# Altium PCB Motherboard.PcbDoc (part 1 of 5)
Units mm, origin at the board's own origin, x right, y up, seen from the top; angles counter-clockwise.
Board outline 133.86 x 67.84 mm, 4 copper layers (Top Layer, Power Plane, Ground Plane, Bottom Layer), stack 1.586 mm thick; 260 components, 155 nets, 877 pads, 1037 vias.
Unrouted connection lines stored in the file: 43.
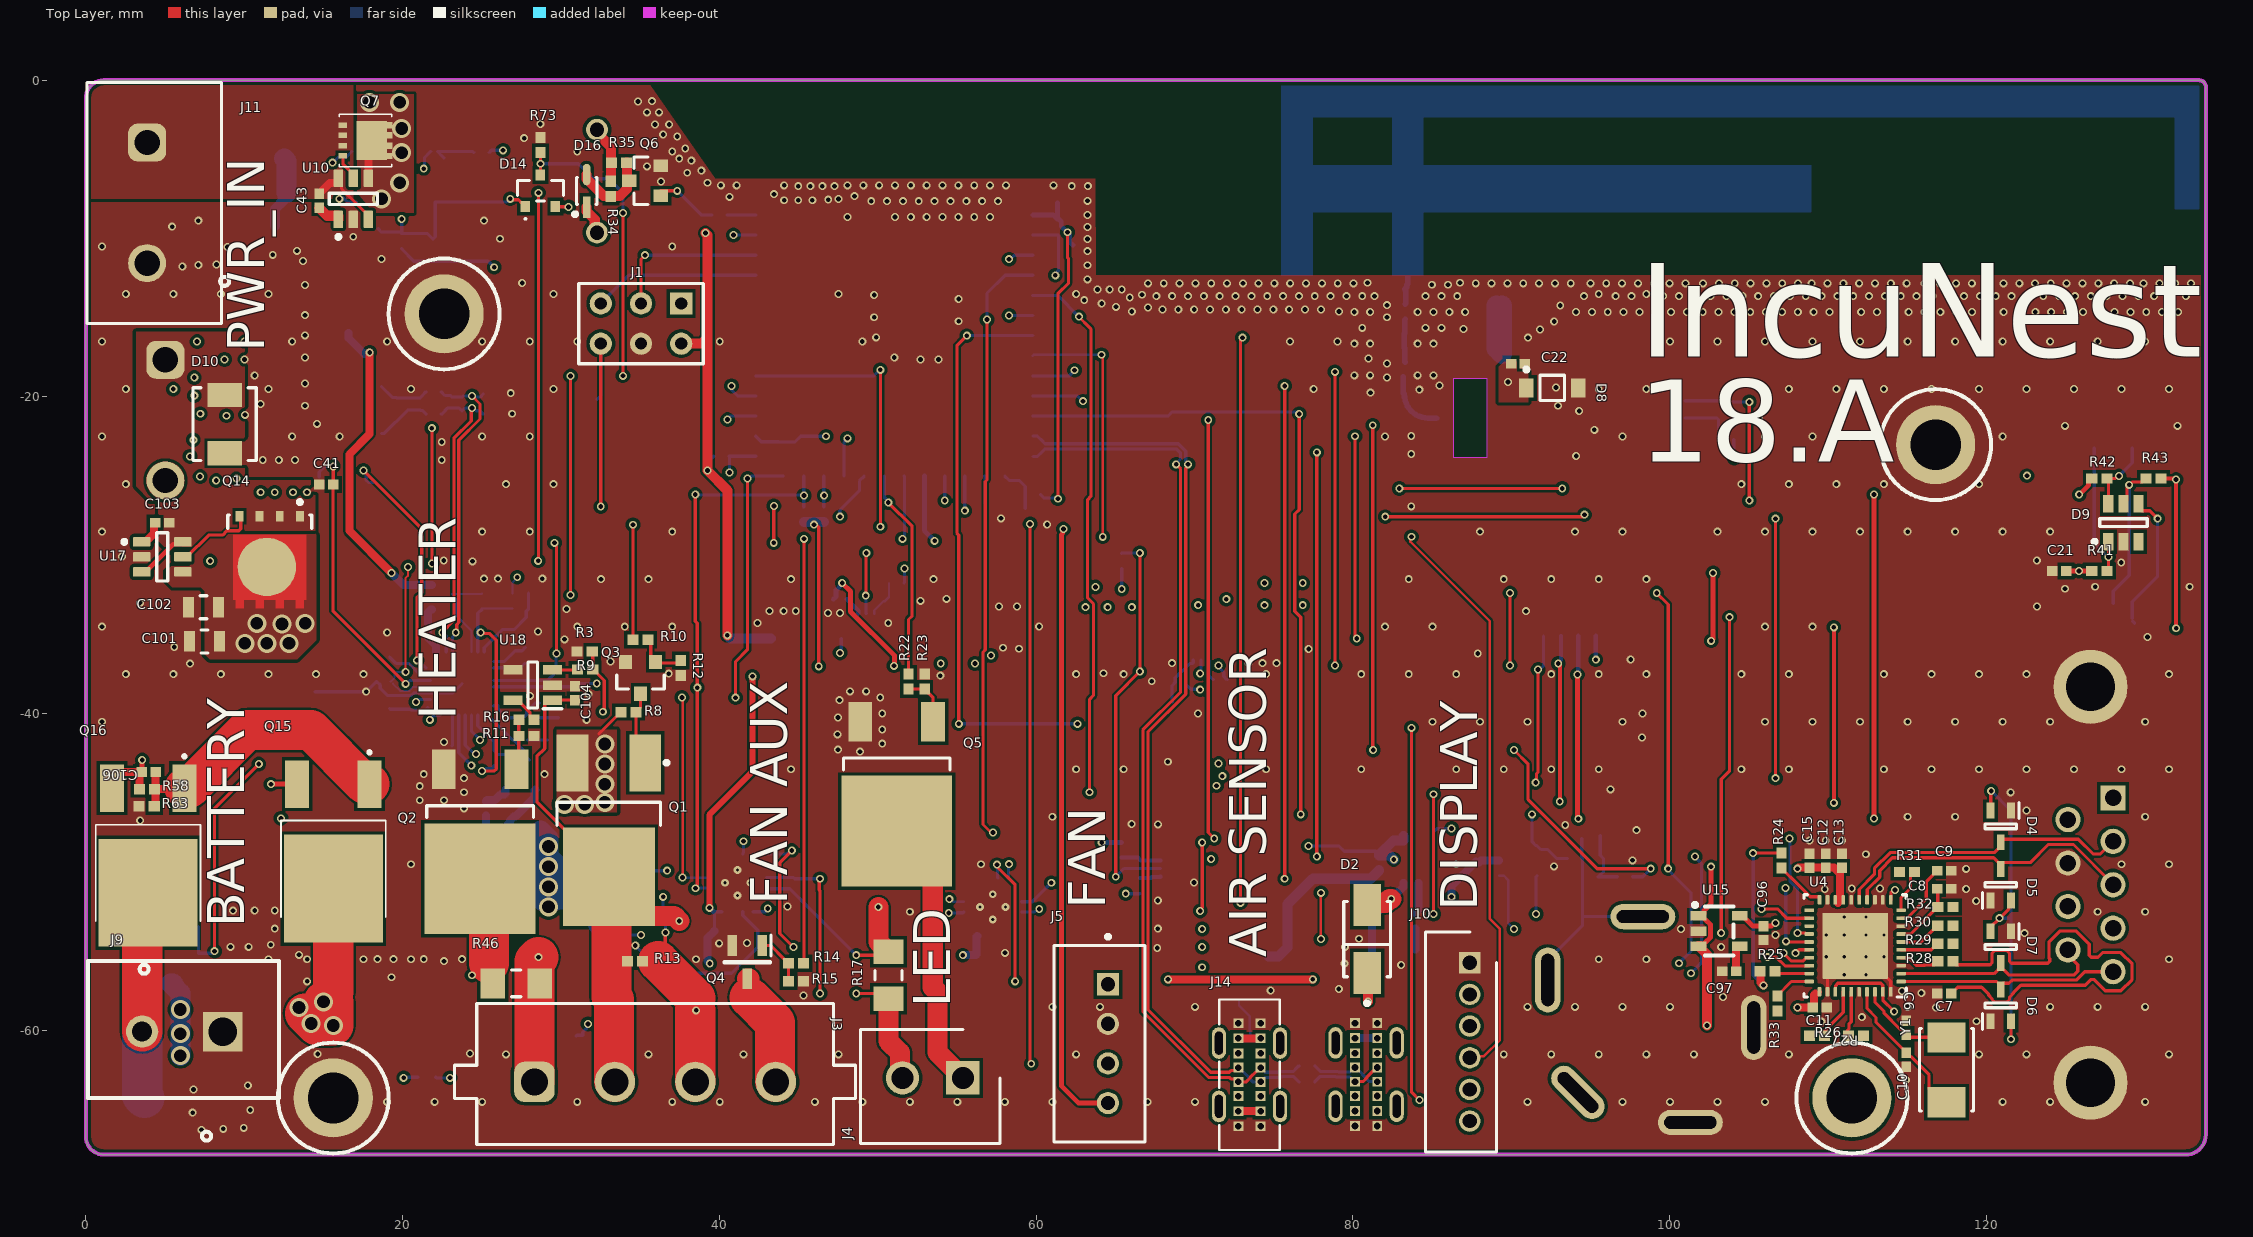
[diagram p0: Top Layer view]
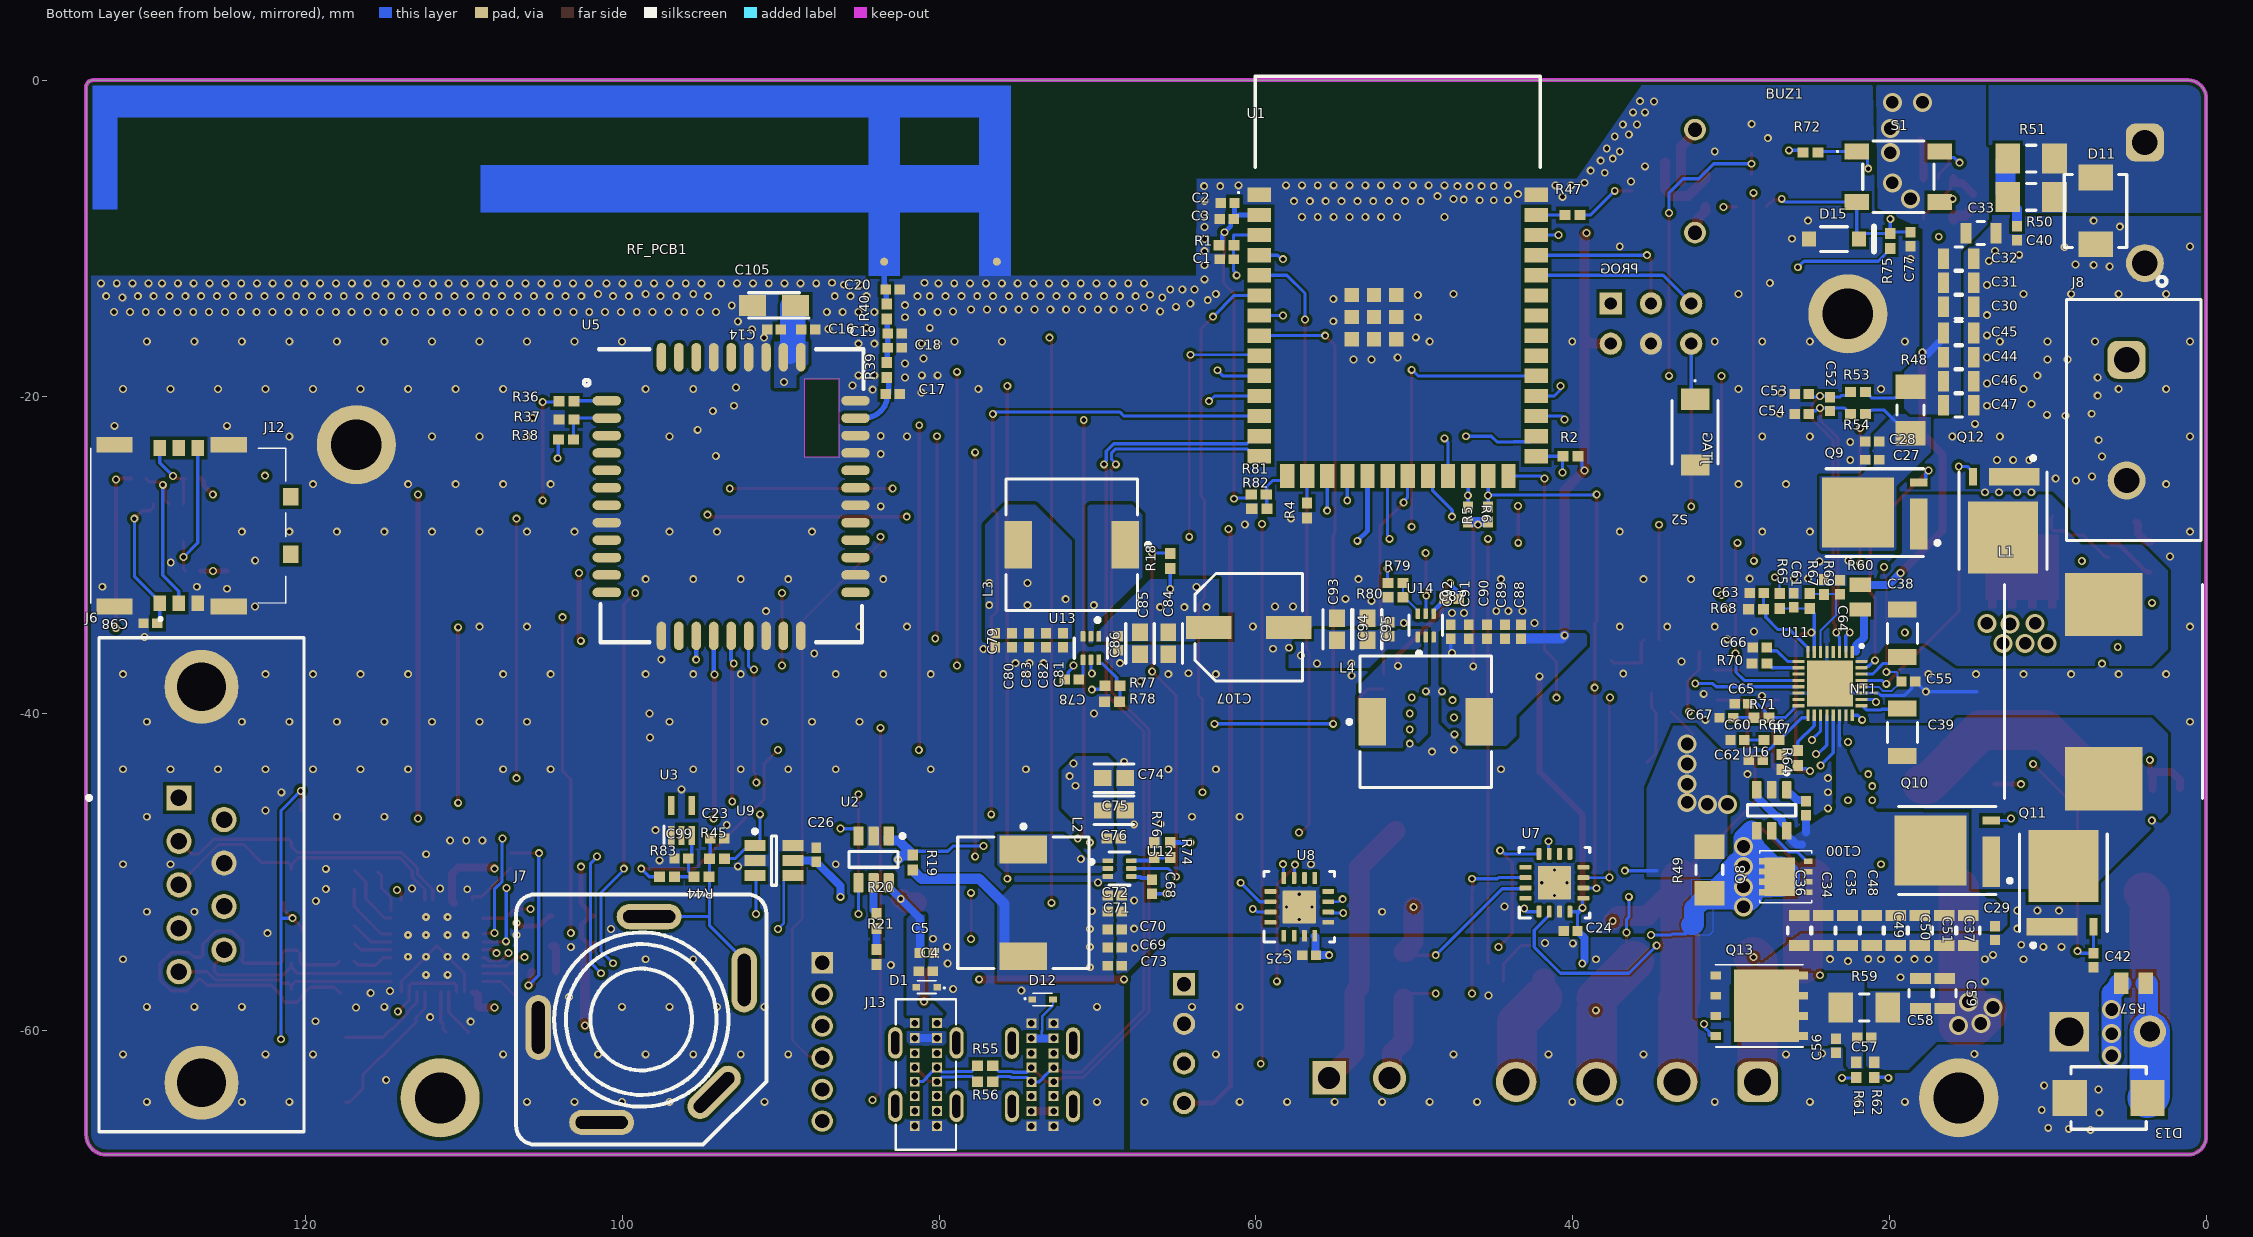
[diagram p1: Bottom Layer view, seen from below]
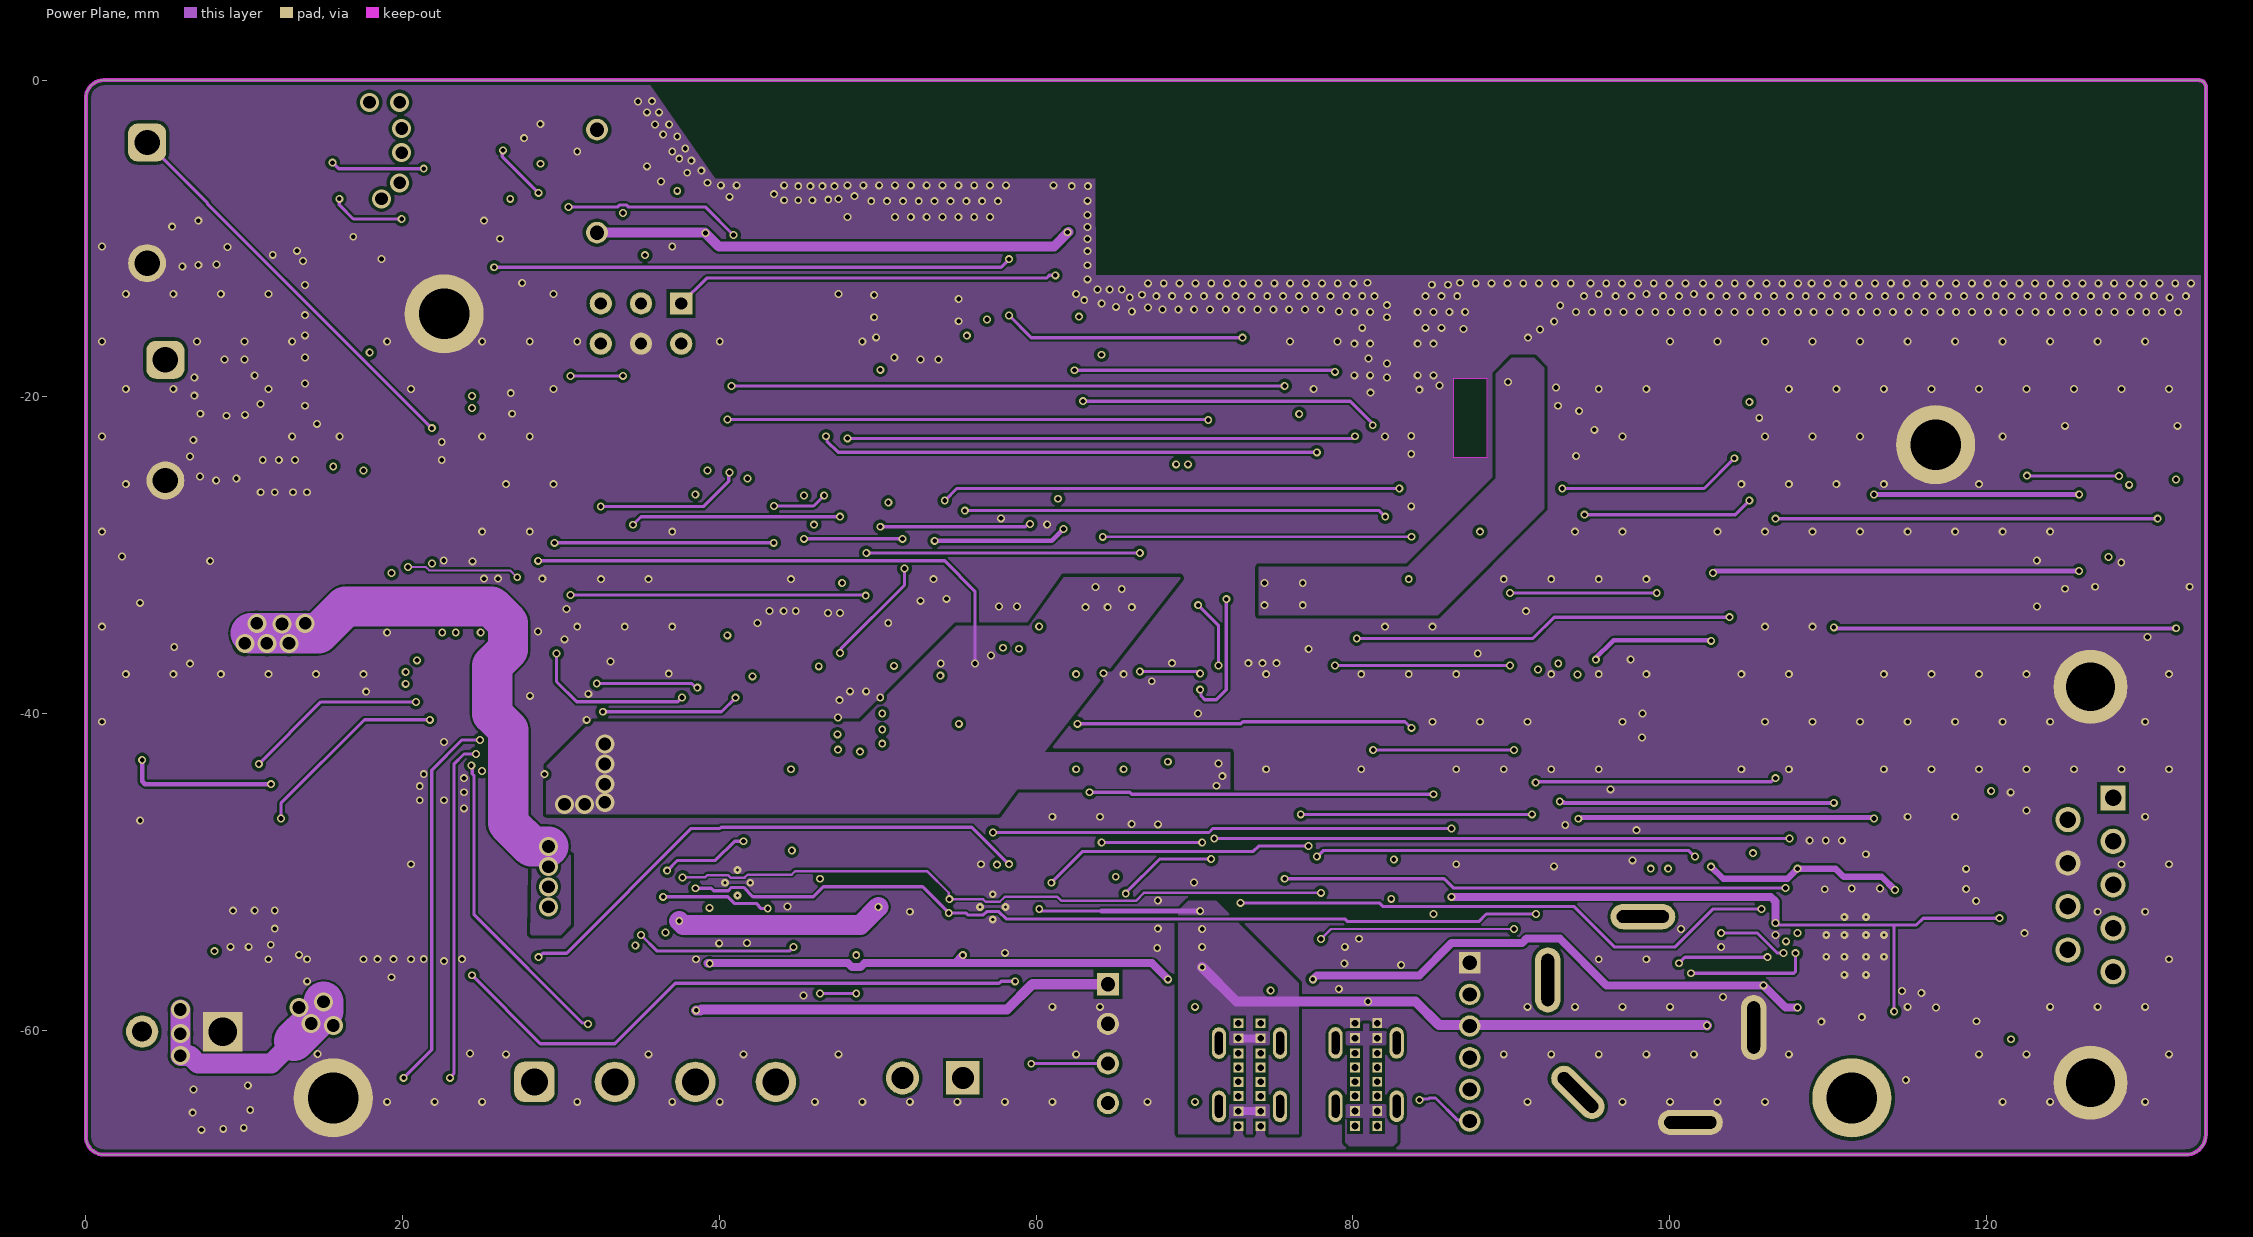
[diagram p2: Power Plane]
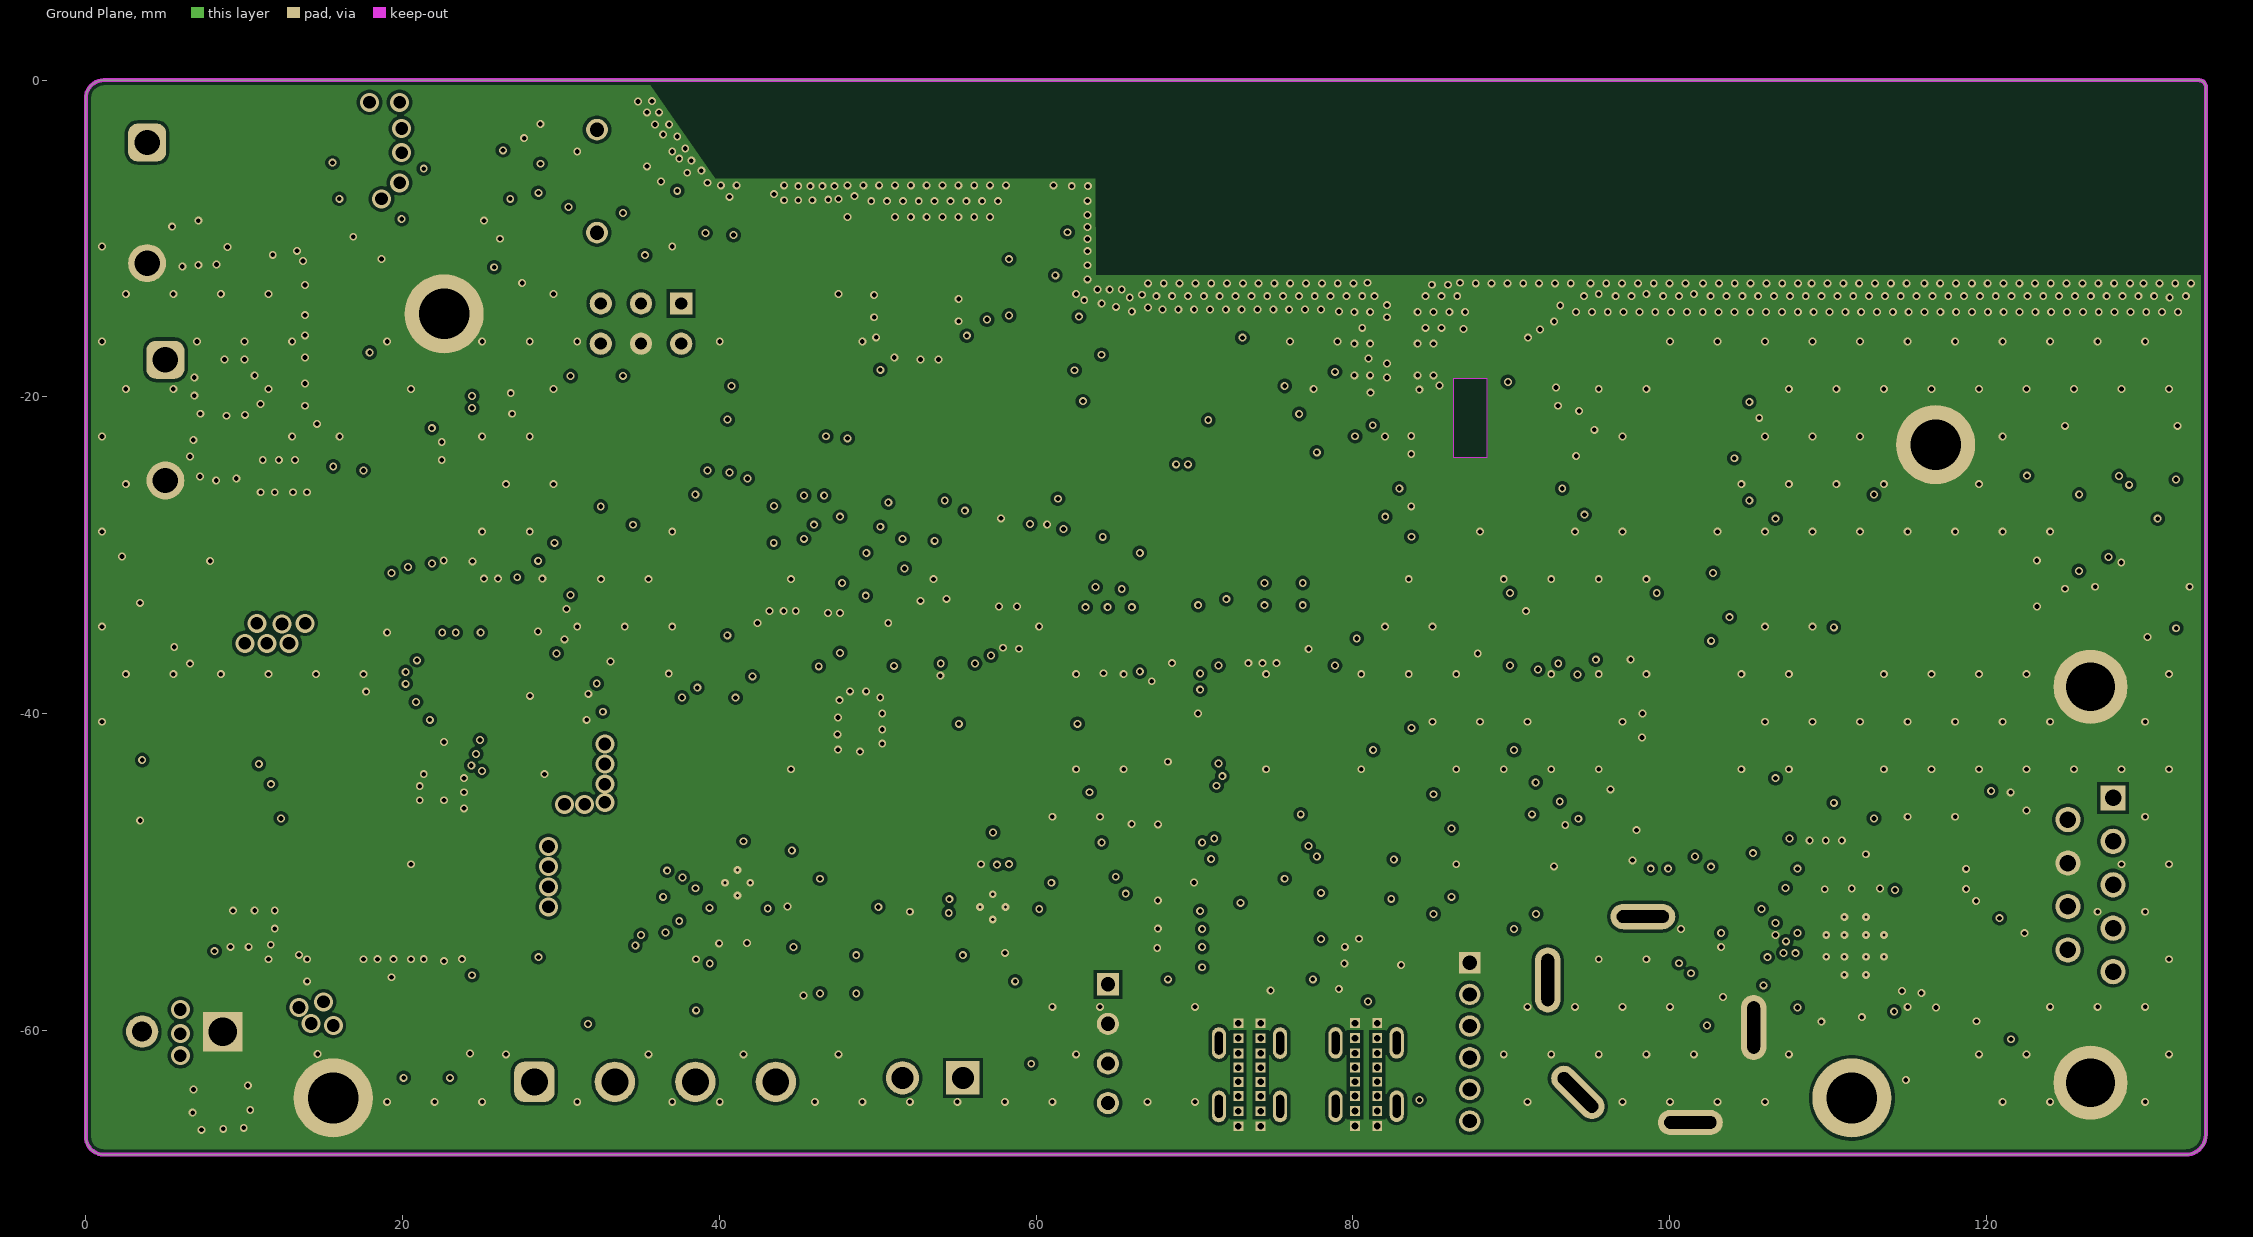
[diagram p3: Ground Plane]
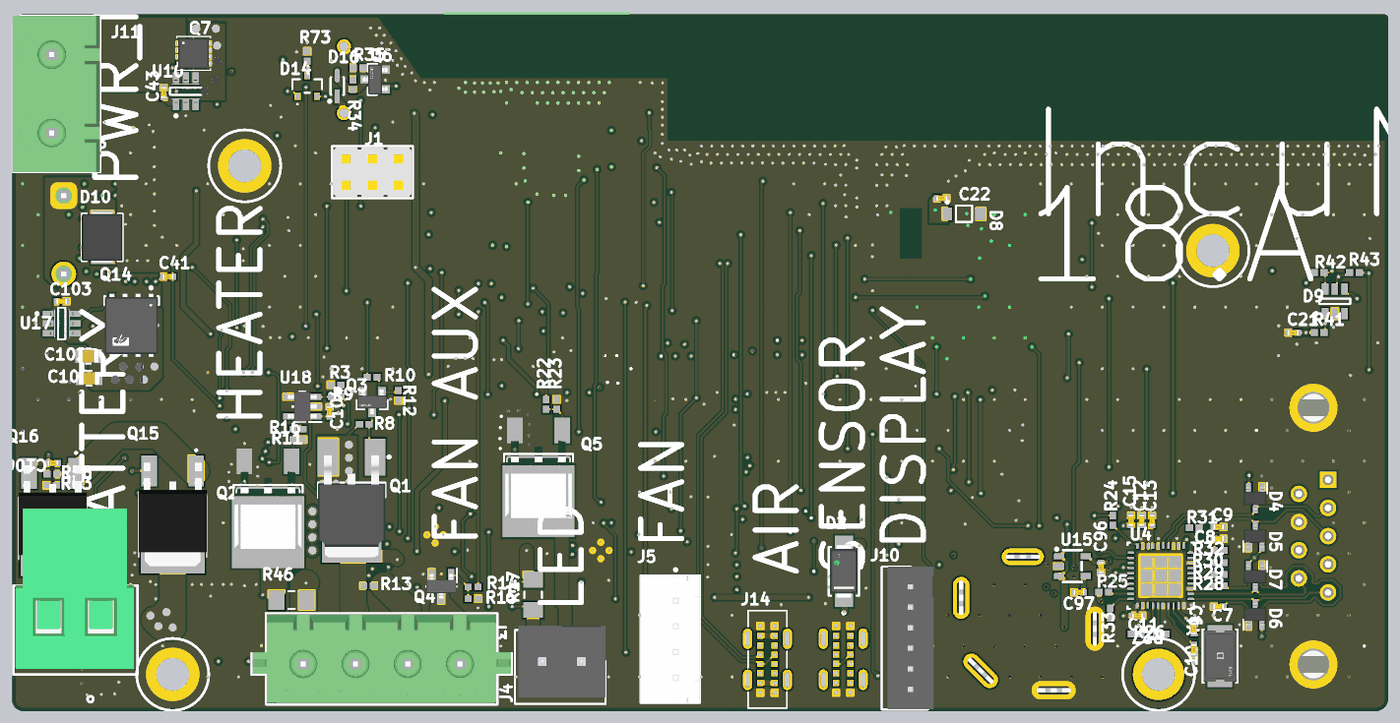
[diagram p6: 3D render of the assembled board from above, using the file's embedded part models]
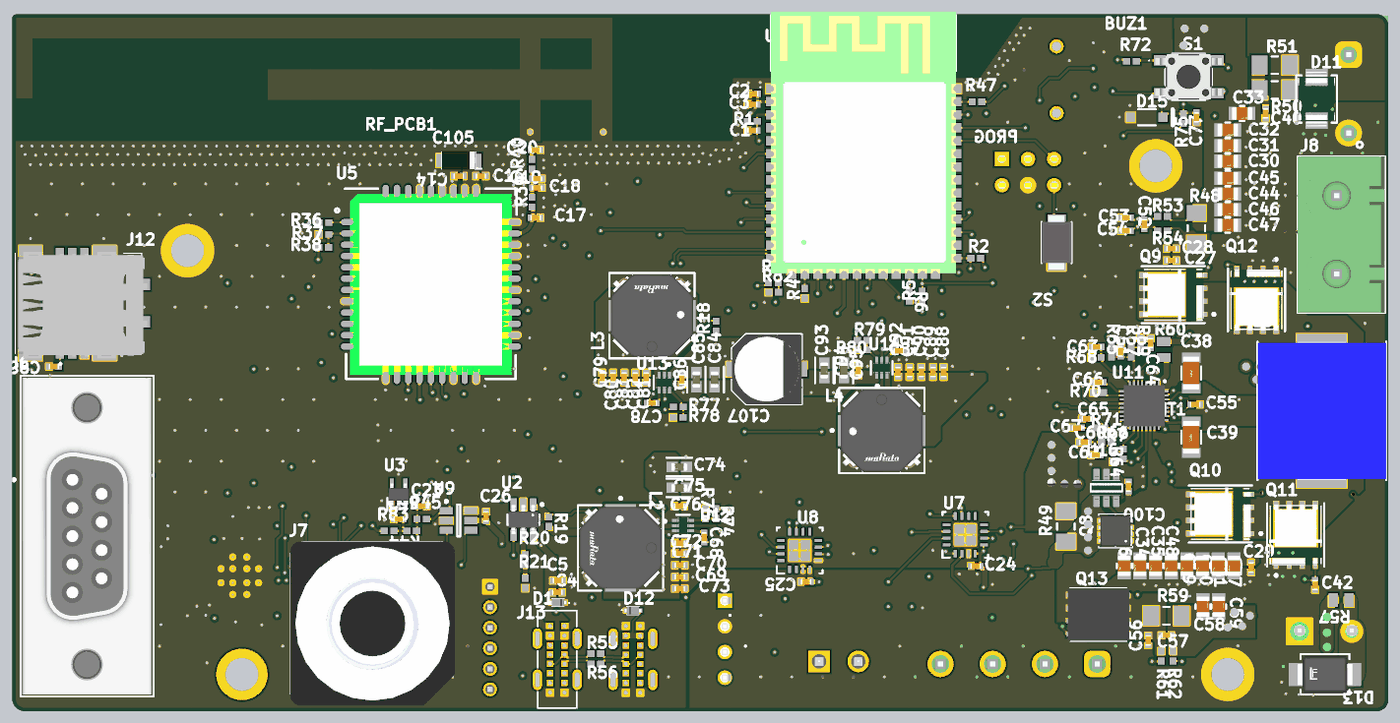
[diagram p7: 3D render of the assembled board from below, using the file's embedded part models]

## Layer stack, top to bottom
Top Solder: solder mask 0.0254, Solder Resist, Dk 3.5
Top Layer: signal copper 0.035
Core1: prepreg 0.2104, FR-4, Dk 3.95
Power Plane: signal copper 0.0152
Core2: core 1.065, FR-4, Dk 3.95
Ground Plane: signal copper 0.0152
Core3: prepreg 0.2104, FR-4, Dk 3.95
Bottom Layer: signal copper 0.035
Bottom Solder: solder mask 0.0254, Solder Resist, Dk 3.5

## Board outline
0,-66.699 0,-1.143 cw(c1.143,-1.143) 1.143,0 133.424,0 cw(c133.424,-0.434) 133.858,-0.434 133.858,-66.572 cw(c132.588,-66.572) 132.588,-67.842 1.143,-67.842 cw(c1.143,-66.699)

## Design rules (kind name [scope] priority, off if disabled: settings)
AssemblyTestPointUsage AssemblyTestPointUsage_1 [All] p2:
AssemblyTestpoint AssemblyTestpoint_1 [All] p2: testpointundercomponent=TRUE minsize=1.016 maxsize=2.54 preferedsize=1.524 minholesize=0 maxholesize=1.016 preferedholesize=0.813 testpointgrid=0.025 usegrid=TRUE gridtolerance=0 allowsidetop=TRUE allowsidebottom=TRUE
Clearance "Board outline clearance" [All vs OnLayer('Keep-Out Layer')] p1: gap=0.2 ignorepadtopadclearanceinfootprint=FALSE except(0: Arc-Hole Track-Hole SMDPad-Hole THPad-Hole Via-Hole Fill-Hole Poly-Hole Region-Hole Text-Hole)
Clearance Clearance_1 [All] p2: gap=0.2 ignorepadtopadclearanceinfootprint=FALSE except(0: Arc-Text Track-Text SMDPad-Text THPad-Text Via-Text Fill-Text Poly-Text Region-Text Text-Text Text-Hole; 0.102: Arc-Arc Arc-Track Arc-SMDPad Track-Track Track-SMDPad; 0.127: Arc-THPad Arc-Via Arc-Fill Arc-Poly Arc-Region Arc-Hole Track-THPad Track-Via Track-Fill Track-Poly Track-Region Track-Hole; 0.152: SMDPad-SMDPad; 0.203: SMDPad-THPad THPad-THPad; 0.254: Via-Via)
ComponentClearance [InComponent('L1')] p1: gap=0 collisioncheckmode=3 verticalgap=0.254 showdistances=FALSE
ComponentClearance UFL [InComponent('RF_CON1')] p2: gap=0 collisioncheckmode=3 verticalgap=0.254 showdistances=FALSE
ComponentClearance ComponentClearance_1 [All] p3: gap=0.254 collisioncheckmode=3 verticalgap=0.254 showdistances=FALSE
DiffPairsRouting DiffPair_USBDiffPairsRouting [InDifferentialPairClass('USB')] p1: maxlimit=0.127 minlimit=0.127 mostfreqgap=0.127 toplayer_minwidth=0.127 toplayer_maxwidth=0.194 toplayer_prefwidth=0.194 midlayer1_minwidth=0.127 midlayer1_maxwidth=0.159 midlayer1_prefwidth=0.159 midlayer2_minwidth=0.127 midlayer2_maxwidth=0.159 midlayer2_prefwidth=0.159 bottomlayer_minwidth=0.127 bottomlayer_maxwidth=0.194 bottomlayer_prefwidth=0.194 impedanceprofiledriven=TRUE impedanceprofileid={170D84A8-33D3-444B-B09E-1C0FCCCC4F91} impedanceprofilevalue=90.000000 maxuncoupledlength=12.7
FabricationTestPointUsage FabricationTestPointUsage_1 [All] p2: valid=0 allowmultiple=FALSE
FabricationTestpoint FabricationTestpoint_1 [All] p2: side=3 testpointundercomponent=TRUE minsize=1.016 maxsize=2.54 preferedsize=1.524 minholesize=0 maxholesize=1.016 preferedholesize=0.813 testpointgrid=0.025 allowsidetop=TRUE allowsidebottom=TRUE usegrid=TRUE gridtolerance=0
FanoutControl Fanout_LCC [IsLCC] p1: bgadir=Out bgaviamode=Centered fanoutstyle=Auto fanoutdirection=Alternating viagrid=0.025 // Fanout_LCC (Default Rule)
FanoutControl Fanout_BGA [IsBGA] p2: bgadir=Out bgaviamode=Centered fanoutstyle=Auto fanoutdirection=Alternating viagrid=0.025 // Fanout_BGA (Default Rule)
FanoutControl Fanout_Small [(CompPinCount < 5)] p3: bgadir=Out bgaviamode=Centered fanoutstyle=Auto fanoutdirection=OutThenIn viagrid=0.025 // Fanout_Small (Default Rule)
FanoutControl Fanout_SOIC [IsSOIC] p4: bgadir=Out bgaviamode=Centered fanoutstyle=Auto fanoutdirection=Alternating viagrid=0.025 // Fanout_SOIC (Default Rule)
FanoutControl Fanout_BGA_1 [IsBGA] p6: bgadir=Out bgaviamode=Centered fanoutstyle=Auto fanoutdirection=Alternating viagrid=0.025 // Fanout_BGA (Default Rule)
FanoutControl Fanout_LCC_1 [IsLCC] p7: bgadir=Out bgaviamode=Centered fanoutstyle=Auto fanoutdirection=Alternating viagrid=0.025 // Fanout_LCC (Default Rule)
FanoutControl Fanout_SOIC_1 [IsSOIC] p8: bgadir=Out bgaviamode=Centered fanoutstyle=Auto fanoutdirection=Alternating viagrid=0.025 // Fanout_SOIC (Default Rule)
FanoutControl Fanout_Small_1 [(CompPinCount < 5)] p9: bgadir=Out bgaviamode=Centered fanoutstyle=Auto fanoutdirection=OutThenIn viagrid=0.025 // Fanout_Small (Default Rule)
FanoutControl Fanout_Default_1 [All] p10: bgadir=Out bgaviamode=Centered fanoutstyle=Auto fanoutdirection=Alternating viagrid=0.025 // Fanout_Default (Default Rule)
Height Height_1 [All] p1: minheight=0 maxheight=50 prefheight=12.7
HoleSize HoleSize_1 [All] p1: absolutevalues=TRUE maxlimit=15 minlimit=0.2 maxpercent=80.000 minpercent=20.000
HoleToHoleClearance u8 [All vs InComponent('u8_1')] p1: gap=0 allowstackedmicrovias=TRUE
HoleToHoleClearance [All] p2: gap=0.254 allowstackedmicrovias=TRUE
LayerPairs LayerPairs_1 [All] p1: enforce=TRUE
MatchedLengths DiffPair_USBMatchedLengths [InDifferentialPairClass('USB')] p1: tolerance=25.4 checknetsindiffpair=FALSE checkdiffpairvsdiffpair=TRUE checkxsignals=TRUE checkothers=TRUE
MinimumAnnularRing [All] p1: minimumring=0.09
MinimumSolderMaskSliver MinimumSolderMaskSliver_1 [All] p1 off: minsoldermaskwidth=0.2
NetAntennae NetAntennae_1 [All] p2: netantennaetolerance=0
PasteMaskExpansion PasteMaskExpansion_1 [All] p2: expansion=0
PlaneClearance PlaneClearance_1 [All] p1: clearance=0.508
PlaneConnect PlaneConnect_1 [All] p1: planeconnectstyle=Direct reliefexpansion=0.508 reliefentries=4 reliefconductorwidth=0.7 reliefairgap=0.254
PolygonConnect Power [All] p1: connectstyle=Direct reliefconductorwidth=2.54 reliefentries=4 polygonreliefangle="90 Angle" airgapwidth=0.254
PolygonConnect Via [IsVia] p2: connectstyle=Direct reliefconductorwidth=0.254 reliefentries=4 polygonreliefangle="90 Angle" airgapwidth=0.254
PolygonConnect [All] p3: connectstyle=Direct reliefconductorwidth=0.508 reliefentries=4 polygonreliefangle="90 Angle" airgapwidth=0.254
RoutingCorners RoutingCorners_1 [All] p2: cornerstyle=45-Degree minsetback=2.54 maxsetback=2.54
RoutingLayers RoutingLayers_1 [All] p2: top layer_v5=TRUE mid layer 1_v5=TRUE mid layer 2_v5=TRUE bottom layer_v5=TRUE
RoutingPriority RoutingPriority_1 [All] p2: routingpriority=0
RoutingTopology RoutingTopology_1 [All] p2: topology=Shortest
RoutingVias RoutingVias_1 [All] p1: holewidth=0.3 width=0.5 viastyle="Through Hole" minholewidth=0.2 minwidth=0.4 maxholewidth=0.711 maxwidth=1.27
ShortCircuit ShortCircuit_Grounds [InNet('PGND') vs InNet('DGND')] p1: allowed=TRUE
ShortCircuit ShortCircuit_Antenna [InNet('NetC20_2')] p2: allowed=TRUE
ShortCircuit [All] p3: allowed=FALSE
SilkToBoardRegionClearance SilkToBoardRegionClearance_1 [InNet('No Net')] p2 off:
SilkToSilkClearance SilkToSilkClearance_1 [All] p1: silktosilkclearance=0
SilkToSolderMaskClearance SilkToSolderMaskClearance_1 [IsPad] p1: minsilkscreentomaskgap=0 clearancetoexposedcopper=TRUE
SolderMaskExpansion [All] p1: expansion=0.102 istentingtop=FALSE
SolderMaskExpansion SolderMaskExpansion_1 [All] p2: expansion=0.102 istentingtop=FALSE
SupplyNets "Schematic Supply Nets" [InNet('V_IN_PROTECTED')] p1: voltage=0.000
SupplyNets "Schematic Supply Nets_1" [InNet('V_OUT')] p2: voltage=0.000
SupplyNets "Schematic Supply Nets_13" [InNet('4V@2A')] p3: voltage=0.000
SupplyNets "Schematic Supply Nets_12" [InNet('DC_ACTUATORS')] p4: voltage=0.000
SupplyNets "Schematic Supply Nets_11" [InNet('V_SYS')] p5: voltage=0.000
SupplyNets "Schematic Supply Nets_10" [InNet('DGND')] p6: voltage=0.000
SupplyNets "Schematic Supply Nets_9" [InNet('3v3_dig@2A')] p7: voltage=0.000
SupplyNets "Schematic Supply Nets_7" [InNet('VUSB')] p8: voltage=0.000
SupplyNets "Schematic Supply Nets_6" [InNet('3v3_ANA@250mA')] p9: voltage=0.000
SupplyNets "Schematic Supply Nets_4" [InNet('V_DDA')] p10: voltage=0.000
SupplyNets "Schematic Supply Nets_3" [InNet('5V@2A')] p11: voltage=0.000
UnRoutedNet UnRoutedNet_1 [All] p1:
UnpouredPolygon UnpouredPolygon_1 [All] p2:
Width Width_GSM_ANTENNA_1 [InNet('NetC17_2') or InNet('NetC18_2') or InNet('NetC20_2')] p1: maxlimit=0.35 minlimit=0.35 preferedwidth=0.35
Width Width_1 [All] p2: maxlimit=8 minlimit=0.1 preferedwidth=0.2
13 further rules are at their usual default settings.

## Classes and differential pairs
differential pair class USB_AUX: USB
component class U_Display: J10
differential pair class USB: D
component class U_Power_Input: C27 C28 C29 C30 C31 C32 C33 C34 C35 C36 C37 C38 C39 C40 C41 C42 C43 C44 C45 C46 C47 C48 C49 C50 C51 C52 C53 C54 C55 C56 C57 C58 C59 C60 C61 C62 C63 C64 C65 C66 C67 C100 C101 C102 C103 C106 D10 D11 D13 J8 J9 J11 L1 NT1 Q7 Q8 Q9 Q10 Q11 Q12 Q13 Q14 Q15 Q16 R7 R48 R49 R50 R51 R53 R54 R57 R58 R59 R60 R61 R62 R63 R64 R65 R66 R67 R68 R69 R70 R71 U10 U11 U16 U17
component class U_GSM: C14 C16 C17 C18 C19 C20 C21 C22 C98 C105 D8 D9 D22 D23 D24 J12 R36 R37 R38 R39 R40 R41 R42 R43 RF_PCB1 U5
differential pair class AFE: IN TX
net class GPRS_RF: NetC17_2 NetC18_2 NetC20_2
component class U_Buzzer: BUZ1 D16 Q6 R34 R35 R47
component class U_AFE: C6 C7 C8 C9 C10 C11 C12 C13 C15 D4 D5 D6 D7 D22 J6 R24 R25 R26 R27 R28 R29 R30 R31 R32 R33 U4 Y1
component class U_Actuators: C4 C5 C104 D1 D2 D20 D21 J3 J4 J5 J13 Q1 Q2 Q3 Q4 Q5 R8 R9 R10 R11 R12 R13 R14 R15 R16 R17 R19 R20 R21 R22 R23 R46 R55 R56 SW1 U2 U18
component class U_sensors: 1 2 3 4 AGND1 C23 C24 C25 C26 C99 D12 DGND1 J7 J14 R44 R45 R83 U3 U7 U8 U9
component class U_power: C68 C69 C70 C71 C72 C73 C74 C75 C76 C77 C78 C79 C80 C81 C82 C83 C84 C85 C86 C87 C88 C89 C90 C91 C92 C93 C94 C95 C96 C97 C107 D14 D15 L2 L3 L4 R18 R72 R73 R74 R75 R76 R77 R78 R79 R80 S1 U12 U13 U14 U15
component class U_uC: C1 C2 C3 J1 R1 R2 R3 R4 R5 R6 R81 R82 S2 U1
differential pair USB: +USB_P -USB_N
differential pair D: +D_P -D_N
differential pair TX: +TX_P -TX_N
differential pair IN: +IN_P -IN_N

## Components (designator, comment, footprint, x,y, rotation, side; value= is the part's Value field where it differs from the comment)
BUZ1 "CUI CMT-1285C-035" BUZZER-12MM-NS 32.273,-6.374 r270 bottom
C1 "1uF 0402 X5R 50V" CAPC1005X55X25NL5T10 61.849,-11.303 r180 bottom
C2 "10uF 0402 X5R 10V" CAPC1005X55X25NL5T10 61.79,-7.747 r180 bottom
C3 "100nF 0402 X7R 50V" CAPC1005X55X25NL5T10 61.849,-8.763 r180 bottom
C4 "10uF 0402 X5R 10V" CAPC1005X55X25NL5T10 80.831,-56.261 r0 bottom
C5 "10uF 0402 X5R 10V" CAPC1005X55X25NL5T10 80.772,-55.118 r0 bottom
C6 "18pF 0402 X5R 50V" CAPC1005X55X25NL5T10 114.935,-59.817 r270 top
C7 "10nF 0402 X7R 50V" CAPC1005X55X25NL5T10 117.348,-57.658 r0 top
C8 "2.2uF 0402 X5R 25V" CAPC1005X55X25NL5T10 117.348,-51.057 r180 top
C9 "2.2uF 0402 X5R 25V" CAPC1005X55X25NL5T10 117.348,-49.914 r180 top
C10 "18pF 0402 X5R 50V" CAPC1005X55X25NL5T10 114.935,-61.849 r90 top
C11 "100nF 0402 X7R 50V" CAPC1005X55X25NL5T10 109.474,-58.547 r180 top
C12 "100nF 0402 X7R 50V" CAPC1005X55X25NL5T10 109.855,-49.276 r270 top
C13 "1uF 0402 X5R 50V" CAPC1005X55X25NL5T10 110.871,-49.276 r270 top
C14 "10uF 0402 X5R 10V" CAPC1005X55X25NL5T10 90.424,-15.748 r180 bottom
C15 "10uF 0402 X5R 10V" CAPC1005X55X25NL5T10 108.839,-49.276 r270 top
C16 "15pF 0402 X5R 50V" CAPC1005X55X25NL5T10 88.265,-15.748 r0 bottom
C17 "100nF 0402 X7R 50V" CAPC1005X55X25NL5T10 82.931,-19.812 r0 bottom
C18 "100nF 0402 X7R 50V" CAPC1005X55X25NL5T10 82.804,-16.891 r0 bottom
C19 "100nF 0402 X7R 50V" CAPC1005X55X25NL5T10 82.804,-16.002 r0 bottom
C20 "100nF 0402 X7R 50V" CAPC1005X55X25NL5T10 82.931,-13.208 r0 bottom
C21 "18pF 0402 X5R 50V" CAPC1005X55X25NL5T10 124.587,-30.988 r0 top
C22 "33pF 0402 X7R 50V" CAPC1005X55X25NL5T10 90.424,-17.907 r0 top
C23 "100nF 0402 X7R 50V" CAPC1005X55X25NL5T10 94.014,-47.879 r0 bottom
C24 "100nF 0402 X7R 50V" CAPC1005X55X25NL5T10 40.132,-53.721 r180 bottom
C25 "100nF 0402 X7R 50V" CAPC1005X55X25NL5T10 56.642,-55.245 r180 bottom
C26 "100nF 0402 X7R 50V" CAPC1005X55X25NL5T10 87.757,-48.895 r270 bottom
C27 "10nF 0402 X7R 50V" CAPC1005X55X25NL5T10 21.087,-23.962 r180 bottom
C28 "1nF 0402 X7R 50V" CAPC1005X55X25NL5T10 21.09,-22.818 r180 bottom
C29 "10nF 0402 X7R 50V" CAPC1005X55X25NL5T10 13.335,-53.848 r90 bottom
C30 "10uF 0805 X5R 50V" FP-GRM21B-0_2-e0_2_0_7-MFG 15.621,-14.314 r180 bottom
C31 "10uF 0805 X5R 50V" FP-GRM21B-0_2-e0_2_0_7-MFG 15.621,-12.79 r180 bottom
C32 "10uF 0805 X5R 50V" FP-GRM21B-0_2-e0_2_0_7-MFG 15.621,-11.266 r180 bottom
C33 "10uF 0805 X5R 50V" FP-GRM21B-0_2-e0_2_0_7-MFG 14.224,-9.652 r180 bottom
C34 "10uF 0805 X5R 50V" FP-GRM21B-0_2-e0_2_0_7-MFG 24.167,-53.692 r270 bottom
C35 "10uF 0805 X5R 50V" FP-GRM21B-0_2-e0_2_0_7-MFG 22.643,-53.692 r270 bottom
C36 "10uF 0805 X5R 50V" FP-GRM21B-0_2-e0_2_0_7-MFG 25.691,-53.692 r270 bottom
C37 "10uF 0805 X5R 50V" FP-GRM21B-0_2-e0_2_0_7-MFG 15.023,-53.692 r270 bottom
C38 "47nF 1206 X7R 50V" FP-CC1206-FD-MFG 19.177,-34.925 r270 bottom
C39 "47nF 1206 X7R 50V" FP-CC1206-FD-MFG 19.177,-41.172 r90 bottom
C40 "1uF 0402 X5R 50V" CAPC1005X55X25NL5T10 11.938,-9.652 r90 bottom
C41 "150pF 0402 X7R 50V" CAPC1005X55X25NL5T10 15.172,-25.527 r0 top
C42 "150pF 0402 X7R 50V" CAPC1005X55X25NL5T10 7.112,-55.558 r90 bottom
C43 "100nF 0402 X7R 50V" CAPC1005X55X25NL5T10 14.732,-7.62 r90 top
C44 "10uF 0805 X5R 50V" FP-GRM21B-0_2-e0_2_0_7-MFG 15.621,-17.489 r180 bottom
C45 "10uF 0805 X5R 50V" FP-GRM21B-0_2-e0_2_0_7-MFG 15.621,-15.965 r180 bottom
C46 "10uF 0805 X5R 50V" FP-GRM21B-0_2-e0_2_0_7-MFG 15.621,-19.013 r180 bottom
C47 "10uF 0805 X5R 50V" FP-GRM21B-0_2-e0_2_0_7-MFG 15.621,-20.537 r180 bottom
C48 "10uF 0805 X5R 50V" FP-GRM21B-0_2-e0_2_0_7-MFG 21.119,-53.692 r270 bottom
C49 "10uF 0805 X5R 50V" FP-GRM21B-0_2-e0_2_0_7-MFG 19.595,-53.692 r270 bottom
C50 "10uF 0805 X5R 50V" FP-GRM21B-0_2-e0_2_0_7-MFG 18.071,-53.692 r270 bottom
C51 "10uF 0805 X5R 50V" FP-GRM21B-0_2-e0_2_0_7-MFG 16.547,-53.692 r270 bottom
C52 "10nF 0402 X7R 50V" CAPC1005X55X25NL5T10 23.749,-20.447 r90 bottom
C53 "33nF 0402 X7R 50V" CAPC1005X55X25NL5T10 25.527,-19.812 r0 bottom
C54 "33nF 0402 X7R 50V" CAPC1005X55X25NL5T10 25.527,-21.082 r0 bottom
C55 "2.2uF 0402 X5R 25V" CAPC1005X55X25NL5T10 18.796,-37.973 r0 bottom
C56 "1uF 0402 X5R 50V" CAPC1005X55X25NL5T10 23.368,-60.96 r90 bottom
C57 "100nF 0402 X7R 50V" CAPC1005X55X25NL5T10 21.59,-60.452 r0 bottom
C58 "10uF 0805 X5R 50V" FP-GRM21B-0_2-e0_2_0_7-MFG 18.034,-57.658 r90 bottom
C59 "10uF 0805 X5R 50V" FP-GRM21B-0_2-e0_2_0_7-MFG 16.51,-57.658 r90 bottom
C60 "680pF 0402 X5R 50V" CAPC1005X55X25NL5T10 29.591,-41.656 r180 bottom
C61 "1uF 0402 X5R 50V" CAPC1005X55X25NL5T10 26.035,-32.834 r270 bottom
C62 "15pF 0402 X5R 50V" CAPC1005X55X25NL5T10 28.448,-42.926 r180 bottom
C63 "100pF 0402 X7R 50V" CAPC1005X55X25NL5T10 28.382,-32.385 r0 bottom
C64 "100pF 0402 X7R 50V" CAPC1005X55X25NL5T10 23.114,-32.004 r90 bottom
C65 "33pF 0402 X7R 50V" CAPC1005X55X25NL5T10 29.337,-39.37 r0 bottom
C66 "100pF 0402 X7R 50V" CAPC1005X55X25NL5T10 28.194,-35.814 r0 bottom
C67 "4.7 uF 0402 X7R 50V" CAPC1005X55X25NL5T10 30.285,-40.259 r0 bottom
C68 "100nF 0402 X7R 50V" CAPC1005X55X25NL5T10 66.548,-50.927 r90 bottom
C69 "10uF 0402 X5R 10V" CAPC1005X55X25NL5T10 68.915,-54.77 r0 bottom
C70 "10uF 0402 X5R 10V" CAPC1005X55X25NL5T10 68.915,-53.627 r0 bottom
C71 "10uF 0402 X5R 10V" CAPC1005X55X25NL5T10 68.915,-52.484 r0 bottom
C72 "10uF 0402 X5R 10V" CAPC1005X55X25NL5T10 68.915,-51.468 r0 bottom
C73 "100nF 0402 X7R 50V" CAPC1005X55X25NL5T10 68.915,-55.913 r0 bottom
C74 "10uF 0603 X5R 25V" FP-GRM188-0_2-IPC_B 68.961,-44.069 r0 bottom
C75 "10uF 0603 X5R 25V" FP-GRM188-0_2-IPC_B 68.961,-46.101 r0 bottom
C76 "100nF 0402 X7R 50V" CAPC1005X55X25NL5T10 68.961,-47.879 r0 bottom
C77 "100nF 0402 X7R 50V" CAPC1005X55X25NL5T10 18.669,-10.033 r90 bottom
C78 "100nF 0402 X7R 50V" CAPC1005X55X25NL5T10 71.628,-37.846 r180 bottom
C79 "10uF 0402 X5R 10V" CAPC1005X55X25NL5T10 76.454,-35.365 r90 bottom
C80 "10uF 0402 X5R 10V" CAPC1005X55X25NL5T10 75.387,-35.365 r90 bottom
C81 "10uF 0402 X5R 10V" CAPC1005X55X25NL5T10 72.187,-35.365 r90 bottom
C82 "10uF 0402 X5R 10V" CAPC1005X55X25NL5T10 73.254,-35.365 r90 bottom
C83 "100nF 0402 X7R 50V" CAPC1005X55X25NL5T10 74.321,-35.365 r90 bottom
C84 "10uF 0603 X5R 25V" FP-GRM188-0_2-IPC_B 65.532,-35.56 r90 bottom
C85 "10uF 0603 X5R 25V" FP-GRM188-0_2-IPC_B 67.31,-35.56 r90 bottom
C86 "100nF 0402 X7R 50V" CAPC1005X55X25NL5T10 68.707,-35.56 r90 bottom
C87 "100nF 0402 X7R 50V" CAPC1005X55X25NL5T10 47.625,-32.766 r0 bottom
C88 "10uF 0402 X5R 10V" CAPC1005X55X25NL5T10 43.256,-34.823 r270 bottom
C89 "10uF 0402 X5R 10V" CAPC1005X55X25NL5T10 44.272,-34.823 r270 bottom
C90 "10uF 0402 X5R 10V" CAPC1005X55X25NL5T10 45.415,-34.823 r270 bottom
C91 "10uF 0402 X5R 10V" CAPC1005X55X25NL5T10 46.558,-34.823 r270 bottom
C92 "100nF 0402 X7R 50V" CAPC1005X55X25NL5T10 47.701,-34.823 r270 bottom
C93 "10uF 0603 X5R 25V" FP-GRM188-0_2-IPC_B 54.864,-34.671 r270 bottom
C94 "10uF 0603 X5R 25V" FP-GRM188-0_2-IPC_B 52.959,-34.671 r270 bottom
C95 "100nF 0402 X7R 50V" CAPC1005X55X25NL5T10 51.562,-34.671 r270 bottom
C96 "1uF 0402 X5R 50V" CAPC1005X55X25NL5T10 105.918,-53.848 r90 top
C97 "1uF 0402 X5R 50V" CAPC1005X55X25NL5T10 103.759,-56.261 r0 top
C98 "100nF 0402 X7R 50V" CAPC1005X55X25NL5T10 129.794,-34.29 r180 bottom
C99 "100nF 0402 X7R 50V" CAPC1005X55X25NL5T10 96.266,-49.149 r180 bottom
C100 "100nF 0402 X7R 50V" CAPC1005X55X25NL5T10 25.273,-45.974 r270 bottom
C101 "10uF 0805 X5R 50V" FP-GRM21B-0_2-e0_2_0_7-MFG 7.493,-35.433 r180 top
C102 "10uF 0805 X5R 50V" FP-GRM21B-0_2-e0_2_0_7-MFG 7.427,-33.274 r180 top
C103 "100nF 0402 X7R 50V" CAPC1005X55X25NL5T10 4.826,-27.94 r0 top
C104 "100nF 0402 X7R 50V" CAPC1005X55X25NL5T10 30.884,-38.697 r90 top
C105 "100uF 6v3" CAPPM3216X180N 90.424,-14.224 r0 bottom
C106 "100nF 0402 X7R 50V" CAPC1005X55X25NL5T10 3.97,-43.688 r0 top
C107 "100uF 25V" CAPAE7067X55L 60.452,-34.544 r180 bottom
D1 "LESD5D5.0CT1G" LESD5D50CT1G 80.772,-57.266 r0 bottom
D2 "SS14" FP-403AE-MFG 80.899,-54.229 r270 top
D4 "BAV99W-7-F" SOT65P210X110-3N 120.904,-47.117 r270 top
D5 "BAV99W-7-F" SOT65P210X110-3N 120.904,-50.8 r90 top
D6 "BAV99W-7-F" SOT65P210X110-3N 120.904,-58.42 r90 top
D7 "BAV99W-7-F" SOT65P210X110-3N 120.904,-54.737 r270 top
D8 "MMSZ5231BT1G" ONSC-SOD-123-2-425-04_V 92.583,-19.431 r0 top
D9 "ESDA6V1-5SC6" MF06A_N 128.651,-27.94 r90 top
D10 "SMBJ24CA-E3/52" VISH-DO-214AA-A-2_V 8.763,-21.717 r90 top
D11 "SMBJ33CA-TR" FP-SMB-CA-MFG 6.985,-8.255 r90 bottom
D12 "LESD5D5.0CT1G" LESD5D50CT1G 73.471,-58.046 r180 bottom
D13 "SMBJ18CA" FP-SMBJ-MFG 6.159,-64.262 r0 bottom
D14 "BAT54C" NXP-SOT23-3_V 28.702,-6.985 r180 top
D15 "BZT52C3V0-7-F" DIOD-SOD123_V 23.495,-10.033 r180 bottom
D16 "BAS316Z" FP-SOD323-IPC_B 31.623,-6.985 r90 top
J1 "Samtec SLW-103-01-T-D" PCB-37z8hw1ej4f71bosen9e-1 37.592,-14.097 r270 top
J3 "691305530004" 691305530004 35.941,-62.746 r0 top
J4 "WJ15EDGVC-3.81-2P" SHDR2W85P0X381_1X2_850X700X935P 55.372,-62.992 r180 top
J5 "B4B-XH-A(LF)(SN)" FP-B4B-XH-A_LF_SN-MFG 64.008,-60.833 r90 top
J6 "2-5747706-0" FP-2-5747706-0-MFG 126.571,-50.8 r90 bottom
J7 "PJ-612" AUDIO-TH_PJ-612 98.806,-59.309 r90 bottom
J8 "691311400102" 691311400102 4.572,-21.463 r270 bottom
J9 "Degson 2EDGK-5.08-02P-14-00AH" PCB-h4cyb3wxd4gf7j132tzl-1 6.096,-60.071 r180 top
J10 "B6B-PH-K_LF__SN_" SHDR6W50P0X200_1X6_1390X450X600P 87.376,-55.722 r90 top
J11 "691311400102" 691311400102 4.318,-7.747 r270 top
J12 "1042240820" 1042240820 127,-28.321 r270 bottom
J13 "TYPE-C 16PLC-H10.0" TYPE-C-TH_16PLC-H10.0 80.834,-62.785 r90 bottom
J14 "TYPE-C 16PLC-H10.0" TYPE-C-TH_16PLC-H10.0 73.471,-62.796 r90 top
L1 "SRP1265A-3R3M" INDPM135125X650N 6.477,-38.608 r270 bottom
L2 "1217AS-H-3R3N=P3" FP-DEM8045C-MFG 74.676,-51.943 r270 bottom
L3 "1217AS-H-3R3N=P3" FP-DEM8045C-MFG 71.628,-29.337 r0 bottom
L4 "1217AS-H-3R3N=P3" FP-DEM8045C-MFG 49.276,-40.513 r180 bottom
NT1 "NetTie_SMD" NETTIE_SMD 21.876,-38.7 r0 bottom net-tie
Q1 "IPD90P03P404ATMA1" "DPAK IPD90P03P404ATMA1" 33.02,-47.498 r270 top
Q2 "IRLR7843TRPBF" FP-PG-TO252-3-MFG 24.892,-48.094 r180 top
Q3 "2N7002-7-F" FP-SOT23-MFG 35.02,-37.74 r270 top
Q4 "IRLML6244TRPBF" SOT95P237X112-3N 41.749,-55.687 r270 top
Q5 "IRLR7843TRPBF" FP-PG-TO252-3-MFG 51.195,-45.088 r180 top
Q6 "2N7002-7-F" FP-SOT23-MFG 35.306,-6.35 r180 top
Q7 "AON7528" AON7520 17.653,-3.81 r270 top
Q8 "AON7528" AON7520 26.539,-50.292 r90 bottom
Q9 "BSC059N04LS6ATMA1" FP-PG-TDSON-8-MFG 20.921,-27.305 r90 bottom
Q10 "BSC059N04LS6ATMA1" FP-PG-TDSON-8-MFG 16.349,-48.641 r90 bottom
Q11 "BSC059N04LS6ATMA1" FP-PG-TDSON-8-MFG 9.017,-50.673 r180 bottom
Q12 "BSC059N04LS6ATMA1" FP-PG-TDSON-8-MFG 12.827,-27.813 r0 bottom
Q13 "AON6407" AON6414A 28.204,-58.441 r270 bottom
Q14 "AON6442" FP-DFN5x6_8L_EP1_P-MFG 11.61,-30.286 r180 top
Q15 "AOD4185" AOD4185 15.621,-48.641 r180 top
Q16 "AOD4185" AOD4185 3.937,-48.895 r180 top
R1 "10k 0402 0.1%" RESC1005X40X25ML05T10 61.849,-10.414 r0 bottom
R2 "10k 0402 0.1%" RESC1005X40X25ML05T10 40.132,-23.749 r180 bottom
R3 "10k 0402 0.1%" RESC1005X40X25ML05T10 31.496,-36.068 r0 top
R4 "10k 0402 0.1%" RESC1005X40X25ML05T10 56.769,-27.178 r90 bottom
R5 "4k7 0402 1%" RESC1005X40X25ML05T10 45.339,-27.432 r90 bottom
R6 "4k7 0402 1%" RESC1005X40X25ML05T10 46.609,-27.432 r90 bottom
R7 "33k 0402 1%" RESC1005X40X25ML05T10 26.797,-43.053 r270 bottom
R8 "10k 0402 0.1%" RESC1005X40X25ML05T10 34.258,-39.899 r0 top
R9 "100R 0402 0.1%" RESC1005X40X25ML05T10 31.529,-37.211 r180 top
R10 "1k 0402 1%" RESC1005X40X25ML05T10 35.02,-35.327 r180 top
R11 "10k 0402 0.1%" RESC1005X40X25ML05T10 27.813,-41.402 r180 top
R12 "10k 0402 0.1%" RESC1005X40X25ML05T10 37.56,-37.105 r90 top
R13 "0.1R 0402 0.1%" RESC1005X40X25ML05T10 34.671,-55.626 r180 top
R14 "100R 0402 0.1%" RESC1005X40X25ML05T10 44.831,-55.753 r180 top
R15 "10k 0402 0.1%" RESC1005X40X25ML05T10 44.831,-56.896 r180 top
R16 "4.99R 0402 1%" RESC1005X40X25ML05T10 27.813,-40.386 r0 top
R17 "0.005R 1206 0.5W 1%" CAPC3216X180X55ML20T25 50.673,-56.515 r270 top
R18 "0R 0402 1%" RESC1005X40X25ML05T10 65.405,-30.353 r90 bottom
R19 "0.1R 0402 0.1%" RESC1005X40X25ML05T10 81.661,-49.403 r90 bottom
R20 "10k 0402 0.1%" RESC1005X40X25ML05T10 83.947,-53.086 r90 bottom
R21 "10k 0402 0.1%" RESC1005X40X25ML05T10 83.947,-55.372 r90 bottom
R22 "100R 0402 0.1%" RESC1005X40X25ML05T10 51.943,-37.973 r270 top
R23 "10k 0402 0.1%" RESC1005X40X25ML05T10 52.959,-37.973 r270 top
R24 "10k 0402 0.1%" RESC1005X40X25ML05T10 107.061,-49.276 r90 top
R25 "10k 0402 0.1%" RESC1005X40X25ML05T10 106.175,-56.264 r180 top
R26 "130Ohm 0402 1%" RESC1005X40X25ML05T10 111.76,-60.325 r180 top
R27 "130Ohm 0402 1%" RESC1005X40X25ML05T10 109.314,-60.325 r0 top
R28 "1k 0402 1%" RESC1005X40X25ML05T10 117.403,-55.626 r180 top
R29 "130Ohm 0402 1%" RESC1005X40X25ML05T10 117.403,-54.533 r180 top
R30 "130Ohm 0402 1%" RESC1005X40X25ML05T10 117.403,-53.39 r180 top
R31 "130Ohm 0402 1%" RESC1005X40X25ML05T10 114.982,-49.988 r0 top
R32 "130Ohm 0402 1%" RESC1005X40X25ML05T10 117.403,-52.2 r180 top
R33 "130Ohm 0402 1%" RESC1005X40X25ML05T10 106.807,-58.293 r270 top
R34 "0R 0402 1%" RESC1005X40X25ML05T10 33.147,-6.858 r270 top
R35 "0R 0402 1%" RESC1005X40X25ML05T10 33.655,-5.207 r0 top
R36 "1k 0402 1%" RESC1005X40X25ML05T10 103.534,-20.279 r0 bottom
R37 "10k 0402 0.1%" RESC1005X40X25ML05T10 103.534,-21.422 r180 bottom
R38 "1k 0402 1%" RESC1005X40X25ML05T10 103.567,-22.692 r0 bottom
R39 "0R 0402 1%" RESC1005X40X25ML05T10 83.312,-18.288 r270 bottom
R40 "0R 0402 1%" RESC1005X40X25ML05T10 83.312,-14.605 r270 bottom
R41 "100R 0402 0.1%" RESC1005X40X25ML05T10 127.127,-30.988 r180 top
R42 "100R 0402 0.1%" RESC1005X40X25ML05T10 127.127,-25.146 r180 top
R43 "100R 0402 0.1%" RESC1005X40X25ML05T10 130.556,-25.146 r0 top
R44 "2k26 0402 0.1%" RESC1005X40X25ML05T10 94.996,-50.292 r0 bottom
R45 "100R 0402 0.1%" RESC1005X40X25ML05T10 94.014,-49.149 r180 bottom
R46 "0.002R 1206 0.5W 1%" CAPC3216X180X55ML20T25 27.178,-57.023 r180 top
R47 "100R 0402 0.1%" RESC1005X40X25ML05T10 40.005,-8.509 r180 bottom
R48 "0.005R 1206 0.5W 1%" CAPC3216X180X55ML20T25 18.669,-20.828 r90 bottom
R49 "0.005R 1206 0.5W 1%" CAPC3216X180X55ML20T25 31.369,-49.862 r270 bottom
R50 "3R9 1206 0.5W 1%" CAPC3216X180X55ML20T25 11.049,-7.366 r0 bottom
R51 "3R9 1206 0.5W 1%" CAPC3216X180X55ML20T25 11.049,-4.953 r0 bottom
R53 "4.99R 0402 1%" RESC1005X40X25ML05T10 21.971,-19.685 r180 bottom
R54 "4.99R 0402 1%" RESC1005X40X25ML05T10 21.971,-21.082 r180 bottom
R55 "0R 0402 1%" RESC1005X40X25ML05T10 77.089,-62.23 r180 bottom
R56 "0R 0402 1%" RESC1005X40X25ML05T10 77.089,-63.246 r180 bottom
R57 "0R 0805 0.5W 1%" RESC2013X65X40LL15T20 4.585,-57.023 r180 bottom
R58 "33k 0402 1%" RESC1005X40X25ML05T10 3.871,-44.761 r0 top
R59 "0.005R 1206 0.5W 1%" CAPC3216X180X55ML20T25 21.59,-58.547 r0 bottom
R60 "1R 0805 0.5W 1%" RESC2013X65X40LL15T20 21.844,-32.639 r90 bottom
R61 "10R 0402 0.1%" RESC1005X40X25ML05T10 22.098,-62.484 r90 bottom
R62 "10R 0402 0.1%" RESC1005X40X25ML05T10 20.955,-62.484 r90 bottom
R63 "10R 0402 0.1%" RESC1005X40X25ML05T10 3.843,-45.847 r0 top
R64 "10k 0402 0.1%" RESC1005X40X25ML05T10 25.781,-42.799 r270 bottom
R65 "10R 0402 0.1%" RESC1005X40X25ML05T10 26.924,-32.893 r90 bottom
R66 "15k 0402 0.1%" RESC1005X40X25ML05T10 27.432,-41.656 r180 bottom
R67 "383k 0402 1%" RESC1005X40X25ML05T10 25.019,-32.893 r90 bottom
R68 "169k 0402 1%" RESC1005X40X25ML05T10 28.415,-33.401 r0 bottom
R69 "220k 0402 1%" RESC1005X40X25ML05T10 24.13,-32.004 r90 bottom
R70 "30.1k 0402 1%" RESC1005X40X25ML05T10 28.194,-36.83 r0 bottom
R71 "40.2k 0402 1%" RESC1005X40X25ML05T10 28.067,-40.259 r0 bottom
R72 "10k 0402 0.1%" RESC1005X40X25ML05T10 24.986,-4.572 r180 bottom
R73 "10k 0402 0.1%" RESC1005X40X25ML05T10 28.702,-4.097 r270 top
R74 "73k2 0402 1%" RESC1005X40X25ML05T10 65.405,-48.611 r90 bottom
R75 "10k 0402 0.1%" RESC1005X40X25ML05T10 19.939,-10.16 r90 bottom
R76 "10k 0402 0.1%" RESC1005X40X25ML05T10 66.421,-48.611 r270 bottom
R77 "56k 0402 0.1%" RESC1005X40X25ML05T10 69.055,-38.227 r0 bottom
R78 "10k 0402 0.1%" RESC1005X40X25ML05T10 69.088,-39.243 r180 bottom
R79 "47k 0402 0.1%" RESC1005X40X25ML05T10 51.181,-31.75 r0 bottom
R80 "10k 0402 0.1%" RESC1005X40X25ML05T10 51.181,-32.639 r180 bottom
R81 "10k 0402 0.1%" RESC1005X40X25ML05T10 59.817,-26.162 r0 bottom
R82 "0R 0402 1%" RESC1005X40X25ML05T10 59.784,-27.051 r0 bottom
R83 "100R 0402 0.1%" RESC1005X40X25ML05T10 97.188,-50.292 r0 bottom
RF_PCB1 "Planar Inverted-F Antenna" PCB-k9titb4465gfk1ijwrnj-1 75.468,-12.349 r180 bottom
S1 "PTS647SK70SMTR2N_LFS" PTS647SK70SMTR2NLFS 19.431,-6.096 r180 bottom
S2 "TS-1088-AR02016" TS1088AR02016 32.273,-22.225 r270 bottom
U1 "ESP32-S3-WROOM-1-N8" ESP32S3WROOM1N8R2 51.041,-12.499 r180 bottom
U2 "TPS2553DBVR" DBV0006A_M 84.135,-49.198 r270 bottom
U3 "LM4040EIM7-2.0_NOPB" SOT65P210X110-5N 96.266,-46.736 r90 bottom
U4 "AFE4490RHAR" RHA0040B_V 111.713,-54.66 r180 top
U5 "Simcom SIM800C" SIM800C 100.979,-20.238 r180 bottom
U7 "INA3221AIRGVR" RGV0016A_V 41.148,-50.673 r90 bottom
U8 "INA3221AIRGVR" RGV0016A_V 57.258,-52.197 r90 bottom
U9 "ADS1110A0IDBVR" TI-DBV6_M 90.424,-49.276 r180 bottom
U10 "LM74700QDBVRQ1" FP-DBV0006A-MFG 16.891,-7.493 r90 top
U11 "BQ25730RSNR" QFN40P400X400X80-33N-D 23.749,-38.1 r270 bottom
U12 "TPS563231DRLR" FP-DRL0006A-MFG 68.602,-49.776 r180 bottom
U13 "TPS563231DRLR" FP-DRL0006A-MFG 70.415,-35.861 r270 bottom
U14 "TPS563231DRLR" FP-DRL0006A-MFG 49.276,-34.417 r90 bottom
U15 "SPX3819M5-L-3-3/TR" SOT-23-5_L3.0-W1.7-P0.95-LS2.8-BR 103.124,-53.721 r180 top
U16 "LM74700QDBVRQ1" FP-DBV0006A-MFG 27.432,-46.101 r270 bottom
U17 "LM74700QDBVRQ1" FP-DBV0006A-MFG 4.826,-30.099 r0 top
U18 "UCC27517ADBVR" SOT95P280X145-5N 28.217,-38.189 r180 top
Y1 "ABM3-8.000MHZ-D2Y-T" FP-ABM3-MFG 117.475,-62.484 r270 top

## Footprints (in the part's own frame and the unit in brackets; to place one, negate y for a bottom-side part, rotate by r counter-clockwise, add the part's x,y. Pads: shape width x height; smd on the part's side, far side on the other; paste and mask are expansions set on the pad)
1042240820 [mm]
  rect 1.1x1 smd: 1(-2.02,6.063) 2(1.62,6.063)
  rect 1x2.3 smd: G1(-5.3,-5.063) G2(-5.3,2.137) G3(4.9,2.137) G4(4.9,-5.063)
  rect 1x0.8 smd: S1(4.7,-2.212) S2(4.7,-1.012) S3(-5.1,-2.212) S4(4.7,0.188) S5(-5.1,-1.012) S6(-5.1,0.188)
  silkscreen extent -5.07,-6.56 5.8,5.74, body extent -5.18,-6.27 5.18,6.28, height 1.11
691305530004 [mm] "5.08mm Vertical PCB Header with Plastic ears, 4p"
  rrect50% 2.55x2.55 hole 1.7: 1(-7.62,-0.5)
  round 2.55 hole 1.7: 2(-2.54,-0.5) 3(2.54,-0.5) 4(7.62,-0.5)
  silkscreen extent -12.66,-4.45 12.66,4.45, body extent -12.56,-4.3 12.56,4.3, height 12.05
691311400102 [mm] "7.62 mm - Closed Vertical PCB Header - 2p"
  rrect50% 2.4x2.4 hole 1.6: 1(-3.81,-0.45)
  round 2.4 hole 1.6: 2(3.81,-0.45)
  silkscreen extent -7.61,-4.25 7.61,4.25, body extent -7.62,-4.26 7.62,4.24, height 12.05
AOD4185 [mm]
  rect 1.5x3 smd: 1(-2.286,-4.2) 3(2.286,-4.2)
  rect 6.25x6.8 smd: 2(0,2.4)
  silkscreen extent -3.3,-6.3 3.3,4.2, body extent -3.3,-5 3.3,5.1, height 2.4
AON6414A [mm]
  rect 0.5x0.65 smd: 1(-1.905,-2.765) 2(-0.635,-2.765) 3(0.635,-2.765) 4(1.905,-2.765)
  rect 0.5x0.55 smd: 5(1.905,2.785) 6(0.635,2.785) 7(-0.635,2.785) 8(-1.905,2.785)
  rect 4.6x4.12 smd: 9(0,0.45)
  silkscreen extent -2.6,-2.79 2.6,2.77, body extent -2.52,-3.01 2.52,3.01, height 0.91
AON7520 [mm]
  rect 0.35x0.55 smd: 1(-0.975,-1.425) 2(-0.325,-1.425) 3(0.325,-1.425) 4(0.975,-1.425)
  rect 2.45x1.93 smd: 5(0,0.385)
  rect 0.4x0.35 smd: 6(0.325,1.525) 7(-0.325,1.525) 8(-0.975,1.525) 9(0.975,1.525)
  silkscreen extent -1.65,-1.65 1.65,1.65, body extent -1.55,-1.6 1.55,1.6, height 0.9
AUDIO-TH_PJ-612 [mm]
  oval 1.6x4.1 hole 0.8 slot 3.3 at 90 deg: 3(6.5,-0.5) 6(-6.5,2.5)
  oval 1.6x4.1 hole 0.8 slot 3.3 at 135 deg rot 45: 4(-4.6,-4.6)
  oval 4.1x1.6 hole 0.8 slot 3.3 at 0 deg: 5(2.5,-6.5) 7(-0.5,6.5)
  silkscreen extent -7.9,-7.9 7.9,7.9, body extent -8,-8 8,8, height 31.3
BUZZER-12MM-NS [mil] "BUZZER-12MM-NS"
  round 54 hole 36: 1(128,0) 2(-127.95,0)
  body extent -233,-233 233,233, height 335
CAPAE7067X55L [mm] "Aluminum Electrolytic Capacitor, Body 6.80x6.80x5.50mm, IPC High Density"
  rect 2.85x1.45 smd: 1(-2.525,0) 2(2.525,0)
  silkscreen extent -3.4,-3.4 3.4,3.4, body extent -3.5,-3.4 3.5,3.4, height 5.5
CAPC1005X55X25NL5T10 [mm] "Chip Capacitor, 2-Leads, Body 1.05x0.55mm, IPC Medium Density"
  rect 0.66x0.62 smd: 1(-0.44,0) 2(0.44,0)
  body extent -0.53,-0.28 0.53,0.28, height 0.55
CAPC3216X180X55ML20T25 [mm]
  rect 1.55x1.9 smd: 1(-1.475,0) 2(1.475,0)
  silkscreen extent -0.3,-0.85 0.3,0.85, body extent -1.7,-0.9 1.7,0.9, height 1.8
CAPPM3216X180N [mm]
  rect 1.7x1.3 smd: 1(-1.35,0) 2(1.35,0)
  silkscreen extent -2.2,-0.8 1.6,0.8, body extent -1.7,-0.9 1.7,0.9, height 1.8
DBV0006A_M [mm] "SOT23, 6-Leads, Body 3.05x1.75mm, Pitch 0.95mm, IPC Low Density"
  rrect15% 1.2x0.65 smd: 1(-1.475,0.95) 2(-1.475,0) 3(-1.475,-0.95) 4(1.475,-0.95) 5(1.475,0) 6(1.475,0.95)
  silkscreen extent -1.6,-1.55 0.5,1.95, body extent -1.42,-1.46 1.42,1.46, height 1.11
DIOD-SOD123_V [mm] "SMD, 2-Leads, Body 2.7x1.55mm"
  rect 0.9x0.95 smd: 1(-1.575,0) 2(1.575,0)
  silkscreen extent -0.86,-0.77 2.52,0.77, body extent -1.35,-0.77 1.35,0.77, height 1.41
"DPAK IPD90P03P404ATMA1" [mm]
  rect 3.6x2 smd: 1(-4.4,2.29) 3(-4.4,-2.29)
  rect 6.2x5.8 smd: 2(2.8,0)
  silkscreen extent -4.52,-3.27 -0.45,3.77, body extent -4.57,-3.27 5.37,3.27, height 2.29
ESP32S3WROOM1N8R2 [mm]
  rect 1.5x0.9 smd: 1(-8.75,5.26) 2(-8.75,3.99) 3(-8.75,2.72) 4(-8.75,1.45) 5(-8.75,0.18) 6(-8.75,-1.09) 7(-8.75,-2.36) 8(-8.75,-3.63) 9(-8.75,-4.9) 10(-8.75,-6.17) 11(-8.75,-7.44) 12(-8.75,-8.71) 13(-8.75,-9.98) 14(-8.75,-11.25) 27(8.75,-11.25) 28(8.75,-9.98) 29(8.75,-8.71) 30(8.75,-7.44) 31(8.75,-6.17) 32(8.75,-4.9) 33(8.75,-3.63) 34(8.75,-2.36) 35(8.75,-1.09) 36(8.75,0.18) 37(8.75,1.45) 38(8.75,2.72) 39(8.75,3.99) 40(8.75,5.26)
  rect 0.9x1.5 smd: 15(-6.985,-12.5) 16(-5.715,-12.5) 17(-4.445,-12.5) 18(-3.175,-12.5) 19(-1.905,-12.5) 20(-0.635,-12.5) 21(0.635,-12.5) 22(1.905,-12.5) 23(3.175,-12.5) 24(4.445,-12.5) 25(5.715,-12.5) 26(6.985,-12.5)
  rect 0.9x0.9 smd: 41(-1.5,-2.46) 42(-1.5,-1.06) 43(-2.9,-1.06) 44(-2.9,-2.46) 45(-2.9,-3.86) 46(-1.5,-3.86) 47(-0.1,-3.86) 48(-0.1,-2.46) 49(-0.1,-1.06)
  silkscreen extent -10.1,5.35 9,12.75, body extent -9,-12.75 9,12.75, height 2.7
FP-2-5747706-0-MFG [mil]
  rect 62.65x62.65 hole 41 paste-99999 mask+0: 1(216,56)
  round 62.65 hole 41 paste-99999 mask+0: 2(108,56) 3(0,56) 4(-108,56) 5(-216,56) 6(162,-56) 7(54,-56) 8(-54,-56) 9(-162,-56)
  round 183.99 hole 121 paste-99999 mask+0: 10(-492,0) 11(492,0)
  silkscreen extent -614,-255 614,284, body extent -606,-248 606,248, height 494
FP-403AE-MFG [mm]
  rect 2.65x1.75 smd paste+0 mask+0: 1(-2.15,0) 2(2.15,0)
  silkscreen extent -2.37,-1.48 4.17,1.48, body extent -3.57,-1.58 3.57,1.58, height 0.25
FP-ABM3-MFG [mm]
  rect 1.9x2.4 smd paste+0 mask+0: 1(-2.05,0) 2(2.05,0)
  silkscreen extent -2.6,-1.7 2.6,1.7, body extent -2.5,-1.6 2.5,1.6, height 1.3
FP-B4B-XH-A_LF_SN-MFG [mm]
  rect 1.4x1.4 hole 0.9 paste-2539.97 mask+0: 1(3.75,-0.525)
  round 1.4 hole 0.9 paste-2539.97 mask+0: 2(1.25,-0.525) 3(-1.25,-0.525) 4(-3.75,-0.525)
  silkscreen extent -6.2,-2.88 6.87,2.88, body extent -6.2,-2.88 6.2,2.88, height 7
FP-CC1206-FD-MFG [mm]
  rect 1x1.8 smd paste+0 mask+0: 1(-1.5,0) 2(1.5,0)
  silkscreen extent -0.63,-0.95 0.63,0.95, body extent -1.6,-0.8 1.6,0.8, height 1.9
FP-DBV0006A-MFG [mm]
  rrect17% 1.1x0.6 smd paste+0 mask+0: 1(-1.3,0.95) 2(-1.3,0) 3(-1.3,-0.95) 4(1.3,-0.95) 5(1.3,0) 6(1.3,0.95)
  silkscreen extent -2.52,-1.53 0.35,1.53, body extent -1.95,-1.78 1.95,1.78, height 0.25
FP-DEM8045C-MFG [mm]
  rect 1.75x3 smd paste+0 mask+0: 1(-3.375,0) 2(3.375,0)
  silkscreen extent -4.95,-4.15 4.15,4.15, body extent -4,-4 4,4, height 4.5
FP-DFN5x6_8L_EP1_P-MFG [mm]
  rect 0.5x0.65 smd paste+0 mask+0: 1(-1.905,-2.75) 2(-0.635,-2.75) 3(0.635,-2.75) 4(1.905,-2.75)
  round 3.687 smd paste+0 mask+0: 5-6-7-8(0.18,0.448)
  Top Layer region: -2.3,-1.6 2.3,-1.6 2.3,2.52 2.155,2.52 2.155,3.07 1.655,3.07 1.655,2.52 0.885,2.52 0.885,3.07 0.385,3.07 0.385,2.52 -0.385,2.52 -0.385,3.07 -0.885,3.07 -0.885,2.52 -1.655,2.52 -1.655,3.07 -2.155,3.07 -2.155,2.52 -2.3,2.52
  silkscreen extent -2.65,-3.77 2.65,-1.97, body extent -2.9,-3.18 2.9,3.17, height 0.25
FP-DRL0006A-MFG [mm]
  rrect33% 0.67x0.3 smd paste+0 mask+0: 1(-0.74,0.5) 2(-0.74,0) 3(-0.74,-0.5) 4(0.74,-0.5) 5(0.74,0) 6(0.74,0.5)
  silkscreen extent -1.9,-1.05 0.65,1.05, body extent -0.8,-0.8 0.8,0.8, height 0.6
FP-GRM21B-0_2-e0_2_0_7-MFG [mm]
  rect 0.7x1.3 smd paste+0 mask+0: 1(-0.95,0) 2(0.95,0)
  silkscreen extent -0.23,-0.72 0.23,0.72, body extent -1,-0.63 1,0.63, height 1.45
FP-GRM188-0_2-IPC_B [mm]
  rect 1.105x1.006 smd paste+0 mask+0: 1(-0.701,0) 2(0.701,0)
  silkscreen extent -1.25,-0.9 1.25,0.9, body extent -0.8,-0.4 0.8,0.4, height 1
FP-PG-TDSON-8-MFG [mm]
  rect 3.2x1.1 smd paste-1000 mask-1000: 1-2-3(-0.715,-2.775)
  rect 0.5x1.1 smd paste-1000 mask+0: 4(1.905,-2.775)
  rect 4.41x4.55 smd paste-1000 mask-1000: 5-6-7-8(0,1.05)
  silkscreen extent -2.78,-4.07 2.78,3.08, body extent -2.7,-3.08 2.7,3.08, height 1.1
FP-PG-TO252-3-MFG [mm]
  rect 1.5x2.5 smd paste+0 mask+0: 1(-2.3,-4.575) 3(2.3,-4.575)
  rect 7x7 smd paste+0 mask+0: 4(0,2.325)
  silkscreen extent -3.36,-2.28 3.36,-1.55, body extent -3.27,-5.21 3.27,5.21, height 2.38
FP-SMB-CA-MFG [mm]
  rect 1.62x2.18 smd paste+0 mask+0: 1(-2.11,0) 2(2.11,0)
  silkscreen extent -2.3,-1.97 2.3,1.97, body extent -2.68,-1.81 2.68,1.81, height 2.65
FP-SMBJ-MFG [mm]
  rect 2.16x2.26 smd paste+0 mask+0: 1(-2.45,0) 2(2.45,0)
  silkscreen extent -2.37,-1.97 2.37,1.97, body extent -2.7,-1.81 2.7,1.81, height 2.61
FP-SOD323-IPC_B [mm]
  rect 1.355x0.476 smd paste+0 mask+0: 1(-1.025,0)
  rrect100% 1.355x0.476 smd paste+0 mask+0: 2(1.025,0)
  silkscreen extent -1.6,-0.65 0.85,0.86
FP-SOT23-MFG [mm]
  rect 0.9x0.8 smd paste+0 mask+0: 1(-1,0.95) 2(-1,-0.95) 3(1,0)
  silkscreen extent -0.18,-1.5 0.7,1.5, body extent -1.55,-1.6 1.55,1.6, height 0.25
INDPM135125X650N [mm]
  rect 4x4.9 smd: 1(-5.5,0) 2(5.5,0)
  silkscreen extent -6.75,-6.25 6.75,6.25, body extent -6.75,-6.25 6.75,6.25, height 6.5
LESD5D50CT1G [mm]
  rect 0.48x0.4 smd: 1(-0.66,0) 2(0.66,0)
  silkscreen extent -1.15,-0.4 0.6,0.4, body extent -0.8,-0.4 0.8,0.4, height 0.6
MF06A_N [mm]
  rect 1.1x0.65 smd: 1(-1.2,0.95) 2(-1.2,0) 3(-1.2,-0.95) 4(1.2,-0.95) 5(1.2,0) 6(1.2,0.95)
  silkscreen extent -1.32,-1.5 0.25,1.95, body extent -0.83,-1.49 0.83,1.5, height 1.22
NETTIE_SMD [mm]
  rect 0.2x0.2 smd mask+0: 1(-1.016,0) 2(1.016,0)
  Top Layer region: -1.016,0.1 1.016,0.1 1.016,-0.1 -1.016,-0.1
NXP-SOT23-3_V [mm] "SOT23, 3-Leads, Body 1.3x2.9mm, Pitch 0.95mm"
  rect 0.6x0.7 smd paste-0.05: 1(0.95,1) 2(-0.95,1) 3(0,-1)
  silkscreen extent -1.45,-0.65 1.45,1.79, body extent -1.45,-0.65 1.45,0.65, height 1.1
ONSC-SOD-123-2-425-04_V [mm] "SOD, 2-Leads, Body 2.69x1.6mm"
  rect 0.91x1.22 smd: 1(-1.635,0) 2(1.635,0)
  silkscreen extent -1.76,-0.8 0.78,1.28, body extent -1.35,-0.8 1.35,0.8, height 1.35
PCB-37z8hw1ej4f71bosen9e-1 [mm] "Low Profile Socket Strip, 2x3 Pins, Vertical, 2.54mm Pitch, Female"
  rect 1.4x1.4 hole 0.762: 1(0,0)
  round 1.4 hole 0.762: 2(2.54,0) 3(0,-2.54) 4(2.54,-2.54) 5(0,-5.08) 6(2.54,-5.08)
  silkscreen extent -1.27,-6.48 3.81,1.4, body extent -1.21,-6.35 3.75,1.27, height 4.57
PCB-h4cyb3wxd4gf7j132tzl-1 [mm]
  rect 2.5x2.5 hole 1.8: 1(-2.54,0)
  round 2.032 hole 1.27: 2(2.54,0)
  silkscreen extent -6.1,-4.45 5.97,4.19, body extent -5.78,-11.94 5.78,3.67, height 21.08
PCB-k9titb4465gfk1ijwrnj-1 [mil]
  round 20 smd mask+4: 1(-315,35) 2(-35,35)
  Top Layer region: 0,0 -78.74,0 -78.74,472.44 0,472.44
  Top Layer region: 0,393.7 -2283.46,393.7 -2283.46,472.44 0,472.44
  Top Layer region: -275.59,0 -354.33,0 -354.33,472.44 -275.59,472.44
  Top Layer region: -35.65,157.48 -1318.92,157.48 -1318.92,275.59 -35.65,275.59
  Top Layer region: -2220.87,164.33 -2283.46,164.33 -2283.46,471.42 -2220.87,471.42
PTS647SK70SMTR2NLFS [mm]
  rect 1.55x1 smd: 1(-2.625,1.6) 2(2.625,1.6) 3(-2.625,-1.6) 4(2.625,-1.6)
  silkscreen extent -3.9,-2.25 2.25,2.25, body extent -3.25,-2.25 3.25,2.25, height 7
QFN40P400X400X80-33N-D [mm]
  rect 0.75x0.2 smd: 1(-2,1.4) 2(-2,1) 3(-2,0.6) 4(-2,0.2) 5(-2,-0.2) 6(-2,-0.6) 7(-2,-1) 8(-2,-1.4) 17(2,-1.4) 18(2,-1) 19(2,-0.6) 20(2,-0.2) 21(2,0.2) 22(2,0.6) 23(2,1) 24(2,1.4)
  rect 0.2x0.75 smd: 9(-1.4,-2) 10(-1,-2) 11(-0.6,-2) 12(-0.2,-2) 13(0.2,-2) 14(0.6,-2) 15(1,-2) 16(1.4,-2) 25(1.4,2) 26(1,2) 27(0.6,2) 28(0.2,2) 29(-0.2,2) 30(-0.6,2) 31(-1,2) 32(-1.4,2)
  rect 2.9x2.9 smd: 33(0,0)
  silkscreen extent -2.47,1.9 -2.28,2.1, body extent -2,-2 2,2, height 0.8
RESC1005X40X25ML05T10 [mm] "Chip Resistor, 2-Leads, Body 1.00x0.50mm, IPC Low Density"
  rect 0.7x0.65 smd: 1(-0.475,0) 2(0.475,0)
  body extent -0.53,-0.27 0.53,0.28, height 0.4
RESC2013X65X40LL15T20 [mm] "Chip Resistor, 2-Leads, Body 2.00x1.30mm, IPC High Density"
  rect 0.9x1.35 smd: 1(-0.775,0) 2(0.775,0)
  body extent -1.07,-0.72 1.07,0.72, height 0.65
RGV0016A_V [mm] "QFN, 16-Leads, Body 4x4mm, Pitch 0.65mm, Thermal Pad 2.16x2.16mm, TI Recommended"
  rrect33% 0.75x0.3 smd: 1(-1.825,0.975) 2(-1.825,0.325) 3(-1.825,-0.325) 4(-1.825,-0.975) 9(1.825,-0.975) 10(1.825,-0.325) 11(1.825,0.325) 12(1.825,0.975)
  rrect33% 0.3x0.75 smd: 5(-0.975,-1.825) 6(-0.325,-1.825) 7(0.325,-1.825) 8(0.975,-1.825) 13(0.975,1.825) 14(0.325,1.825) 15(-0.325,1.825) 16(-0.975,1.825)
  rrect11% 0.939x0.939 on Bottom Paste: 17(-0.57,-0.57) 17(-0.57,0.57) 17(0.57,-0.57) 17(0.57,0.57)
  rrect5% 2.1x2.1 smd paste-1.08: 17(0,0)
  silkscreen extent -2.22,-2.22 2.22,2.22, body extent -2.07,-2.07 2.07,2.07, height 1.01
RHA0040B_V [mm] "QFN, 40-Leads, Body 6x6mm, Pitch 0.5mm, Thermal Pad 4.15 x 4.15mm, TI Recommended"
  rrect43% 0.6x0.23 smd mask+0.07: 1(-2.9,2.25) 2(-2.9,1.75) 3(-2.9,1.25) 4(-2.9,0.75) 5(-2.9,0.25) 6(-2.9,-0.25) 7(-2.9,-0.75) 8(-2.9,-1.25) 9(-2.9,-1.75) 10(-2.9,-2.25) 21(2.9,-2.25) 22(2.9,-1.75) 23(2.9,-1.25) 24(2.9,-0.75) 25(2.9,-0.25) 26(2.9,0.25) 27(2.9,0.75) 28(2.9,1.25) 29(2.9,1.75) 30(2.9,2.25)
  rrect43% 0.23x0.6 smd mask+0.07: 11(-2.25,-2.9) 12(-1.75,-2.9) 13(-1.25,-2.9) 14(-0.75,-2.9) 15(-0.25,-2.9) 16(0.25,-2.9) 17(0.75,-2.9) 18(1.25,-2.9) 19(1.75,-2.9) 20(2.25,-2.9) 31(2.25,2.9) 32(1.75,2.9) 33(1.25,2.9) 34(0.75,2.9) 35(0.25,2.9) 36(-0.25,2.9) 37(-0.75,2.9) 38(-1.25,2.9) 39(-1.75,2.9) 40(-2.25,2.9)
  rrect2% 4.15x4.15 smd paste-2.1: 41(0,0)
  silkscreen extent -3.22,-3.22 3.22,3.22, body extent -3.08,-3.08 3.08,3.08, height 1.01
SHDR2W85P0X381_1X2_850X700X935P [mm]
  rect 2.1x2.1 hole 1.4: 1(0,0)
  round 2.1 hole 1.4: 2(3.81,0)
  silkscreen extent -2.34,-3.05 6.46,4.15, body extent -2.34,-3.5 6.15,3.5, height 9.35
SHDR6W50P0X200_1X6_1390X450X600P [mm]
  rect 1.35x1.35 hole 0.9: 1(0,0)
  round 1.35 hole 0.9: 2(-2,0) 3(-4,0) 4(-6,0) 5(-8,0) 6(-10,0)
  silkscreen extent -11.95,-1.7 1.95,2.8, body extent -11.95,-2.25 1.95,2.25, height 6
SIM800C [mm]
  oval 1.8x0.6 smd: 1(0,0) 2(0,-1.1) 3(0,-2.2) 4(0,-3.3) 5(0,-4.4) 6(0,-5.5) 7(0,-6.6) 8(0,-7.7) 9(0,-8.8) 10(0,-9.9) 11(0,-11) 12(0,-12.1) 22(15.7,-12.1) 23(15.7,-11) 24(15.7,-9.9) 25(15.7,-8.8) 26(15.7,-7.7) 27(15.7,-6.6) 28(15.7,-5.5) 29(15.7,-4.4) 30(15.7,-3.3) 31(15.7,-2.2) 32(15.7,-1.1) 33(15.7,0)
  oval 0.6x1.8 smd: 13(3.45,-14.85) 14(4.55,-14.85) 15(5.65,-14.85) 16(6.75,-14.85) 17(7.85,-14.85) 18(8.95,-14.85) 19(10.05,-14.85) 20(11.15,-14.85) 21(12.25,-14.85) 34(12.25,2.75) 35(11.15,2.75) 36(10.05,2.75) 37(8.95,2.75) 38(7.85,2.75) 39(6.75,2.75) 40(5.65,2.75) 41(4.55,2.75) 42(3.45,2.75)
  Keep-Out Layer pour cut-out: 12.5,1.38 14.65,1.38 14.65,-3.57 12.5,-3.57
  silkscreen extent -1.45,-15.25 16.2,3.25, body extent 0,-14.85 15.7,2.75, height 2.3
SOT65P210X110-3N [mm]
  rect 1x0.5 smd: 1(-1,0.65) 2(-1,-0.65) 3(1,0)
  silkscreen extent -1.5,-1 0.15,1.15, body extent -1.1,-1.1 1.1,1.1, height 1.1
SOT65P210X110-5N [mm]
  rect 1.2x0.4 smd: 1(-0.95,0.65) 2(-0.95,0) 3(-0.95,-0.65) 4(0.95,-0.65) 5(0.95,0.65)
  silkscreen extent -1.55,1.1 -0.35,1.1, body extent -1.05,-1 1.05,1, height 1
SOT95P237X112-3N [mm]
  rect 1.3x0.6 smd: 1(-1.05,0.95) 2(-1.05,-0.95) 3(1.05,0)
  silkscreen extent -1.7,-1.46 0.05,1.5, body extent -1.18,-1.46 1.18,1.46, height 1.12
SOT95P280X145-5N [mm]
  rect 1.2x0.6 smd: 1(-1.25,0.95) 2(-1.25,0) 3(-1.25,-0.95) 4(1.25,-0.95) 5(1.25,0.95)
  silkscreen extent -1.85,-1.45 0.3,1.5, body extent -1.4,-1.45 1.4,1.45, height 1.2
SOT-23-5_L3.0-W1.7-P0.95-LS2.8-BR [mm]
  rect 1x0.6 smd: 1(1.3,-0.95) 2(1.3,0) 3(1.3,0.95) 4(-1.3,0.95) 5(-1.3,-0.95)
  silkscreen extent -0.9,-1.78 1.65,1.55
TI-DBV6_M [mm] "SOT23, 6-Leads, Body 2.9x1.6mm, Pitch 0.95mm, IPC Low Density"
  rect 1.3x0.7 smd: 1(-1.2,0.95) 2(-1.2,0) 3(-1.2,-0.95) 4(1.2,-0.95) 5(1.2,0) 6(1.2,0.95)
  silkscreen extent -1.33,-1.55 0.15,1.97, body extent -0.87,-1.52 0.87,1.53, height 1.45
TS1088AR02016 [mm]
  rect 1.35x1.8 smd: 1(-2.075,0) 2(2.075,0)
  silkscreen extent -3.3,-1.45 2,1.45, body extent -2.62,-1.45 2.62,1.45, height 2.1
TYPE-C-TH_16PLC-H10.0 [mm]
  rect 0.62x0.62 hole 0.42: A1(-3.25,0.7) A4(-2.3,0.7) A5(-1.35,0.7) A6(-0.45,0.7) A7(0.45,0.7) A8(1.35,0.7) A9(2.3,0.7) A12(3.25,0.7) B1(3.25,-0.7) B4(2.3,-0.7) B5(1.35,-0.7) B6(0.45,-0.7) B7(-0.45,-0.7) B8(-1.35,-0.7) B9(-2.3,-0.7) B12(-3.25,-0.7)
  oval 2x0.9 hole 0.5 slot 1.45 at 0 deg: A2(-2,1.93) A10(2,1.93) B2(2,-1.93) B10(-2,-1.93)
  silkscreen extent -4.75,-1.9 4.75,1.9
VISH-DO-214AA-A-2_V [mm] "Molded Diode, 2-Leads, Body 4.57x3.94mm"
  rect 1.52x2.18 smd: 1(-1.84,0) 2(1.839,0)
  silkscreen extent -2.3,-2 2.3,2, body extent -2.5,-1.97 2.5,1.97, height 2.44

## Part data
BUZ1: library part CMP-581a9557be5887dd-1, "Audio Buzzer Magnetic 3Vo-p 5Vo-p 70mA 3.5Vo-p 85dB Through Hole Pin Tray", LCSC_PN=C252915, Manufacturer Part Number=CMT-1285C-035, Manufacturer Part Number 2=GMC1205YA-16R2048, Lead-Free Status="Lead Free", Mounting Style="Through Hole", Octopart URL=https://octopart.com/cmt-1285c-035-cui-71811876, OctopartID=581a9557be5887dd, RoHS=Compliant
C1 C13 C40 C56 C61 C96 C97: library part CMP-1662-00020-1, LCSC_PN=C1518208, ComponentLink1Description="Manufacturer URL", ComponentLink1URL=http://www.murata.com/, ComponentLink2Description=Datasheet, ComponentLink2URL=http://psearch.en.murata.com/capacitor/product/GRM155R60J105KE19%23.pdf
C2 C4 C5 C14 C15 C69 C70 C71 C72 C79 C80 C81 C82 C88 C89 C90 C91: library part CMP-1662-00020-1, LCSC_PN=C77000, ComponentLink1Description="Manufacturer URL", ComponentLink1URL=http://www.murata.com/, ComponentLink2Description=Datasheet, ComponentLink2URL=http://psearch.en.murata.com/capacitor/product/GRM155R60J105KE19%23.pdf
C3 C11 C12 C17 C18 C19 C20 C23 C24 C25 C26 C43 C57 C68 C73 C76 C77 C78 C83 C86 C87 C92 C95 C98 C99 C100 C103 C104 C106: library part CMP-1662-00020-1, LCSC_PN=C77020, ComponentLink1Description="Manufacturer URL", ComponentLink1URL=http://www.murata.com/, ComponentLink2Description=Datasheet, ComponentLink2URL=http://psearch.en.murata.com/capacitor/product/GRM155R60J105KE19%23.pdf
C6 C10 C21: library part CMP-1662-00020-1, LCSC_PN=C33149, ComponentLink1Description="Manufacturer URL", ComponentLink1URL=http://www.murata.com/, ComponentLink2Description=Datasheet, ComponentLink2URL=http://psearch.en.murata.com/capacitor/product/GRM155R60J105KE19%23.pdf
C7 C27 C29 C52: library part CMP-1662-00020-1, LCSC_PN=C60133, ComponentLink1Description="Manufacturer URL", ComponentLink1URL=http://www.murata.com/, ComponentLink2Description=Datasheet, ComponentLink2URL=http://psearch.en.murata.com/capacitor/product/GRM155R60J105KE19%23.pdf
C8 C9 C55: library part CMP-1662-00020-1, LCSC_PN=C77002, ComponentLink1Description="Manufacturer URL", ComponentLink1URL=http://www.murata.com/, ComponentLink2Description=Datasheet, ComponentLink2URL=http://psearch.en.murata.com/capacitor/product/GRM155R60J105KE19%23.pdf
C16 C62: library part CMP-1662-00020-1, LCSC_PN=C86285, ComponentLink1Description="Manufacturer URL", ComponentLink1URL=http://www.murata.com/, ComponentLink2Description=Datasheet, ComponentLink2URL=http://psearch.en.murata.com/capacitor/product/GRM155R60J105KE19%23.pdf
C22 C65: library part CMP-1662-00020-1, LCSC_PN=C107005, ComponentLink1Description="Manufacturer URL", ComponentLink1URL=http://www.murata.com/, ComponentLink2Description=Datasheet, ComponentLink2URL=http://psearch.en.murata.com/capacitor/product/GRM155R60J105KE19%23.pdf
C28: library part CMP-1662-00020-1, LCSC_PN=C93920, ComponentLink1Description="Manufacturer URL", ComponentLink1URL=http://www.murata.com/, ComponentLink2Description=Datasheet, ComponentLink2URL=http://psearch.en.murata.com/capacitor/product/GRM155R60J105KE19%23.pdf
C30 C31 C32 C33 C34 C35 C36 C37 C44 C45 C46 C47 C48 C49 C50 C51 C58 C59 C101 C102: library part CMP-06035-048920-1, "Chip Multilayer Ceramic Capacitors for General Purpose, 0805, 10uF, X5R, 15%, 10%, 35V", Capacitance=10uF, Case Code (Imperial)=0805, Case Code (Metric)=2012, Dielectric=X5R, LCSC_PN=C2932476, Max Operating Temperature=85°C, Min Operating Temperature=-55°C, Package Quantity=3000, Tolerance=10%, Voltage Rating=35V, Case/Package=0805, Height=1.25mm, Lead Free="Lead Free", Length=0.079inch, Mount="Surface Mount", Packaging="Tape and Reel", REACH SVHC="No SVHC", Termination=SMD/SMT, Thickness=0.057inch, Voltage Rating (DC)=35V, Weight=0.000335oz, Width=0.049inch
C38 C39: library part CMP-03422-001420-1, "CAP CER 10UF 50V X5R 1206", Capacitance=47nF, Case/Package=1206, Dielectric=X5R, LCSC_PN=C107209, Max Operating Temperature=85°C, Min Operating Temperature=-55°C, Tolerance=10%, Voltage Rating=50V, Halogen Free="Halogen Free", Lead Free="Lead Free", Length=0.126inch, Mount="Surface Mount", Packaging="Tape and Reel", RoHS Compliant=Yes, Thickness=0.075inch, Voltage Rating (DC)=50V, Width=0.063inch
C41 C42: library part CMP-1662-00020-1, LCSC_PN=C113789, ComponentLink1Description="Manufacturer URL", ComponentLink1URL=http://www.murata.com/, ComponentLink2Description=Datasheet, ComponentLink2URL=http://psearch.en.murata.com/capacitor/product/GRM155R60J105KE19%23.pdf
C53 C54: library part CMP-1662-00020-1, LCSC_PN=C106862, ComponentLink1Description="Manufacturer URL", ComponentLink1URL=http://www.murata.com/, ComponentLink2Description=Datasheet, ComponentLink2URL=http://psearch.en.murata.com/capacitor/product/GRM155R60J105KE19%23.pdf
C60: library part CMP-1662-00020-1, LCSC_PN=C307451, ComponentLink1Description="Manufacturer URL", ComponentLink1URL=http://www.murata.com/, ComponentLink2Description=Datasheet, ComponentLink2URL=http://psearch.en.murata.com/capacitor/product/GRM155R60J105KE19%23.pdf
C63 C64 C66: library part CMP-1662-00020-1, LCSC_PN=C281751, ComponentLink1Description="Manufacturer URL", ComponentLink1URL=http://www.murata.com/, ComponentLink2Description=Datasheet, ComponentLink2URL=http://psearch.en.murata.com/capacitor/product/GRM155R60J105KE19%23.pdf
C67: library part CMP-1662-00020-1, LCSC_PN=C23733, ComponentLink1Description="Manufacturer URL", ComponentLink1URL=http://www.murata.com/, ComponentLink2Description=Datasheet, ComponentLink2URL=http://psearch.en.murata.com/capacitor/product/GRM155R60J105KE19%23.pdf
C74 C75 C84 C85 C93 C94: library part CMP-06035-022879-1, LCSC_PN=C91606
C105: library part TMCMA0J107MTRF, "Capacitor Polarised", LCSC_PN=C1954161, Manufacturer_Name=Vishay, Mouser Part Number=74-TMCMA0J107MTRF, Arrow Part Number=TMCMA0J107MTRF, Arrow Price/Stock=https://www.arrow.com/en/products/tmcma0j107mtrf/vishay?utm_currency=USD&region=nac, Datasheet Link=http://www.vishay.com/docs/40178/tmcm.pdf, Height=1.8mm, Manufacturer_Part_Number=TMCMA0J107MTRF, Mouser Price/Stock=https://www.mouser.co.uk/ProductDetail/Vishay-Sprague/TMCMA0J107MTRF?qs=NgbZBzc1CyGhyyzGhg4Jvg%3D%3D